# Altium PCB cam_FX3.PcbDoc (part 1 of 2)
Units mm, origin at the board's own origin, x right, y up, seen from the top; angles counter-clockwise.
Board outline 27 x 27 mm, 6 copper layers (Signal_T, GND_T, PWR, Signal_INT, GND_B, Signal_B), stack 0.816 mm thick; 79 components, 95 nets, 507 pads, 300 vias.
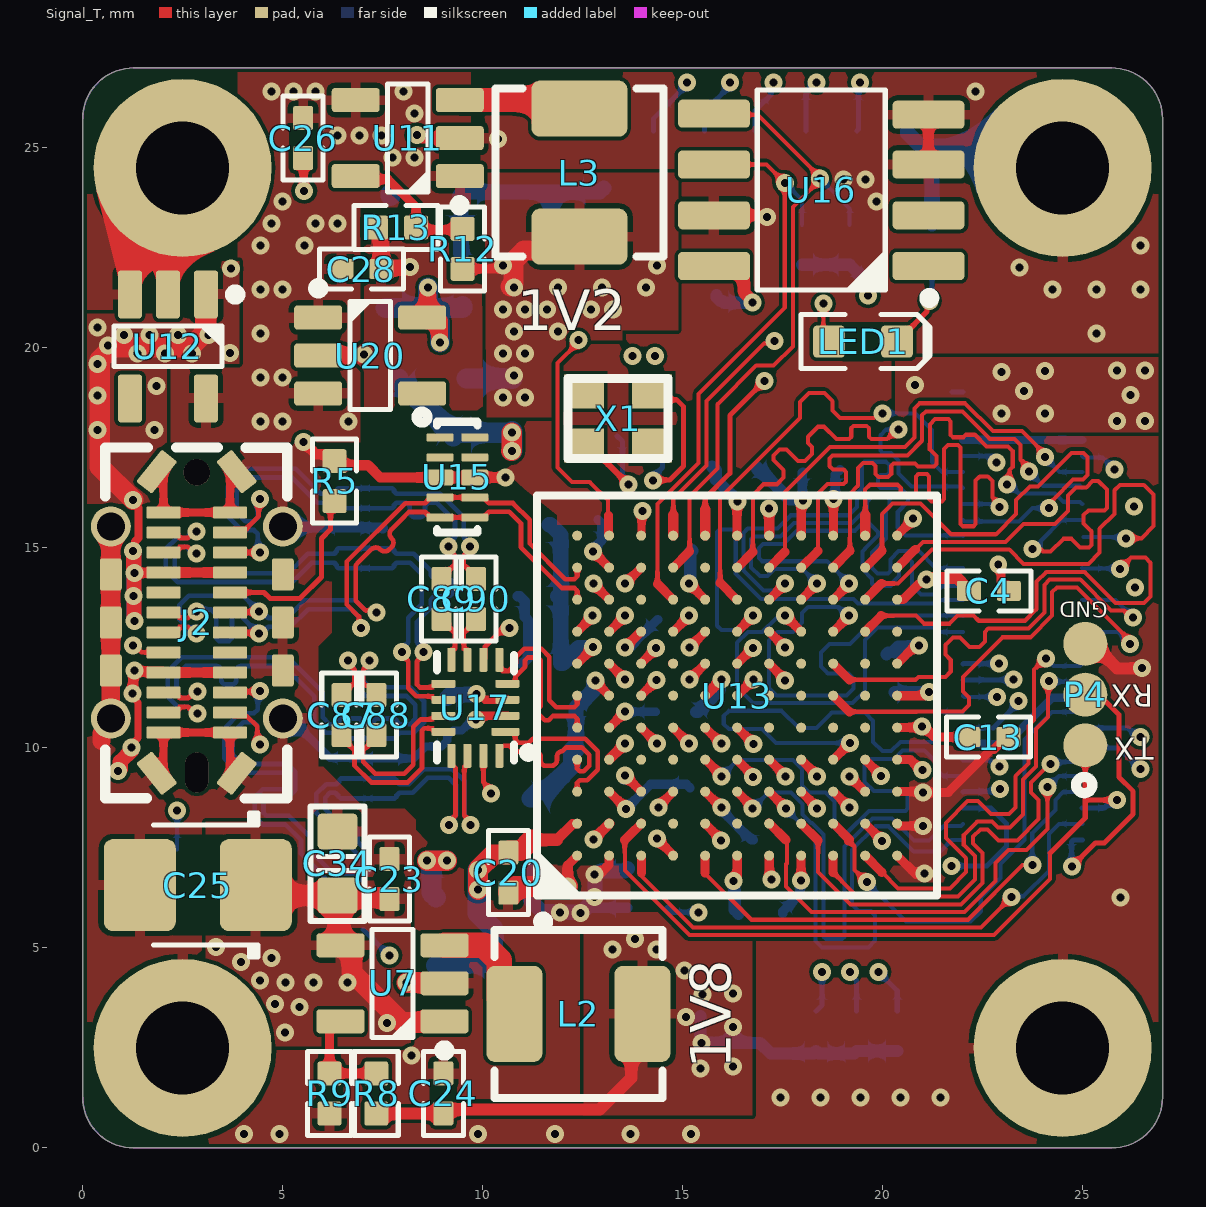
[diagram p0: Signal_T view]
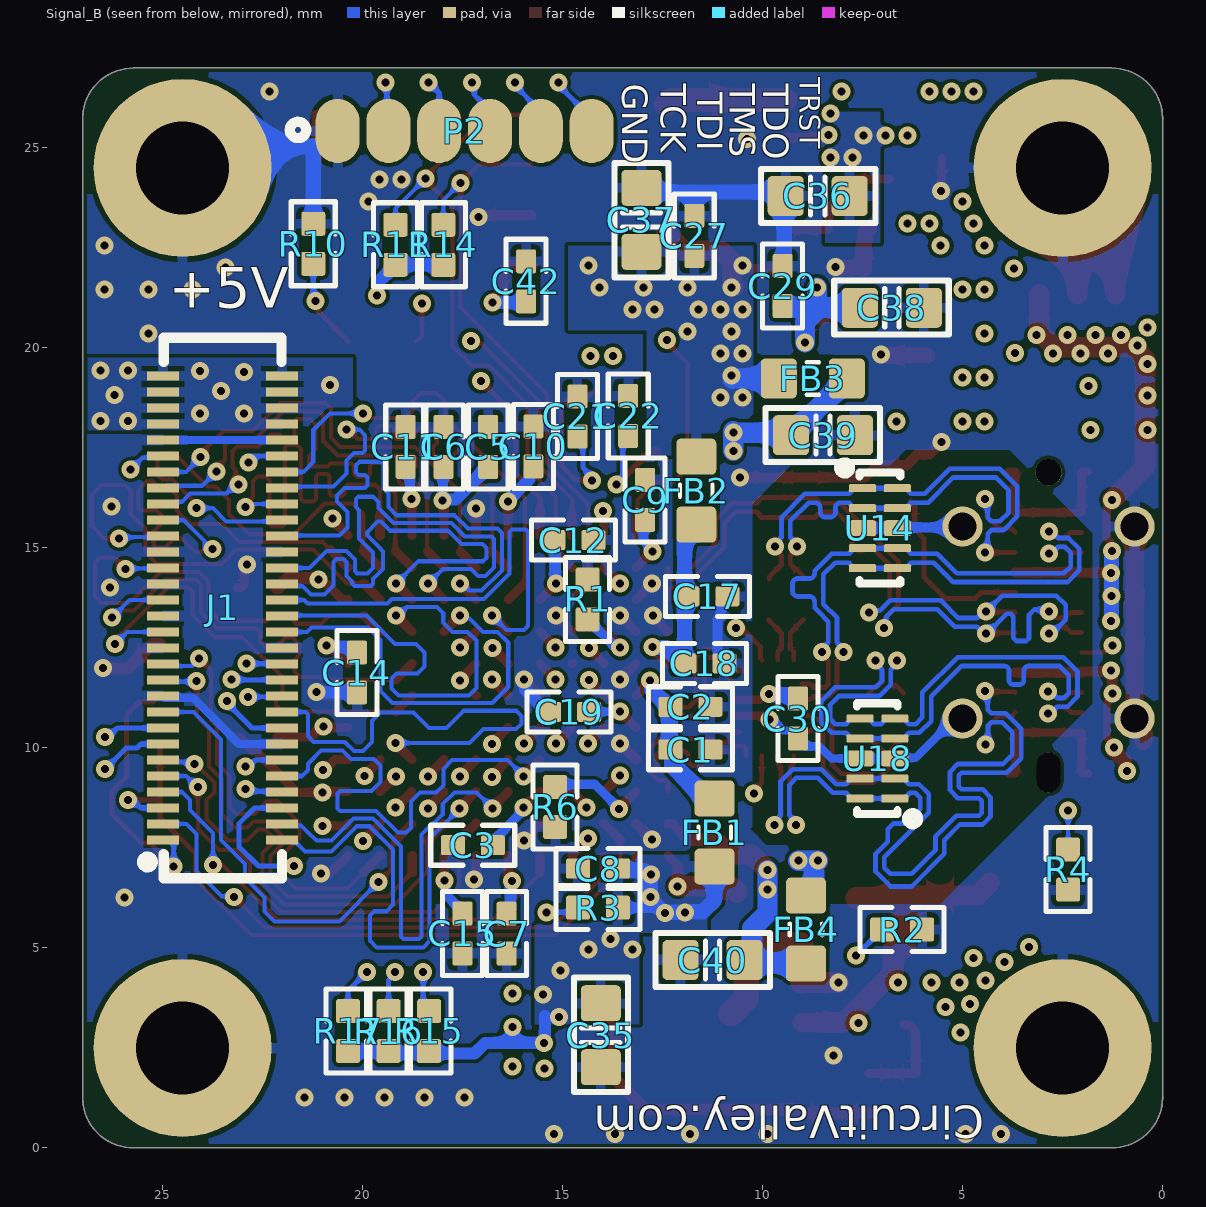
[diagram p1: Signal_B view, seen from below]
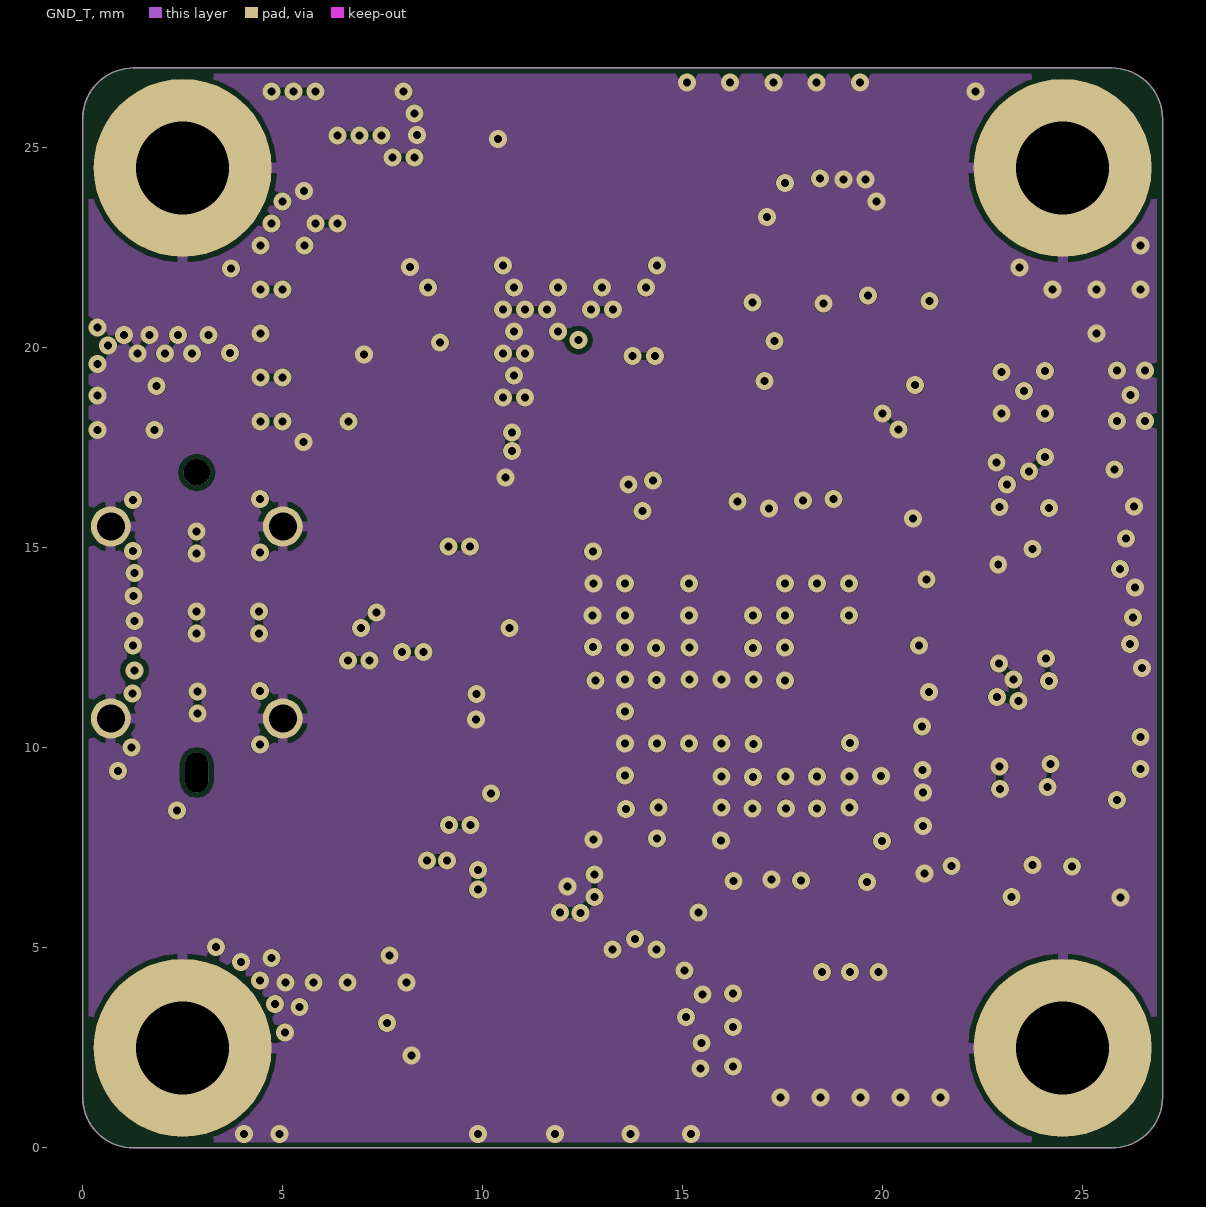
[diagram p2: GND_T]
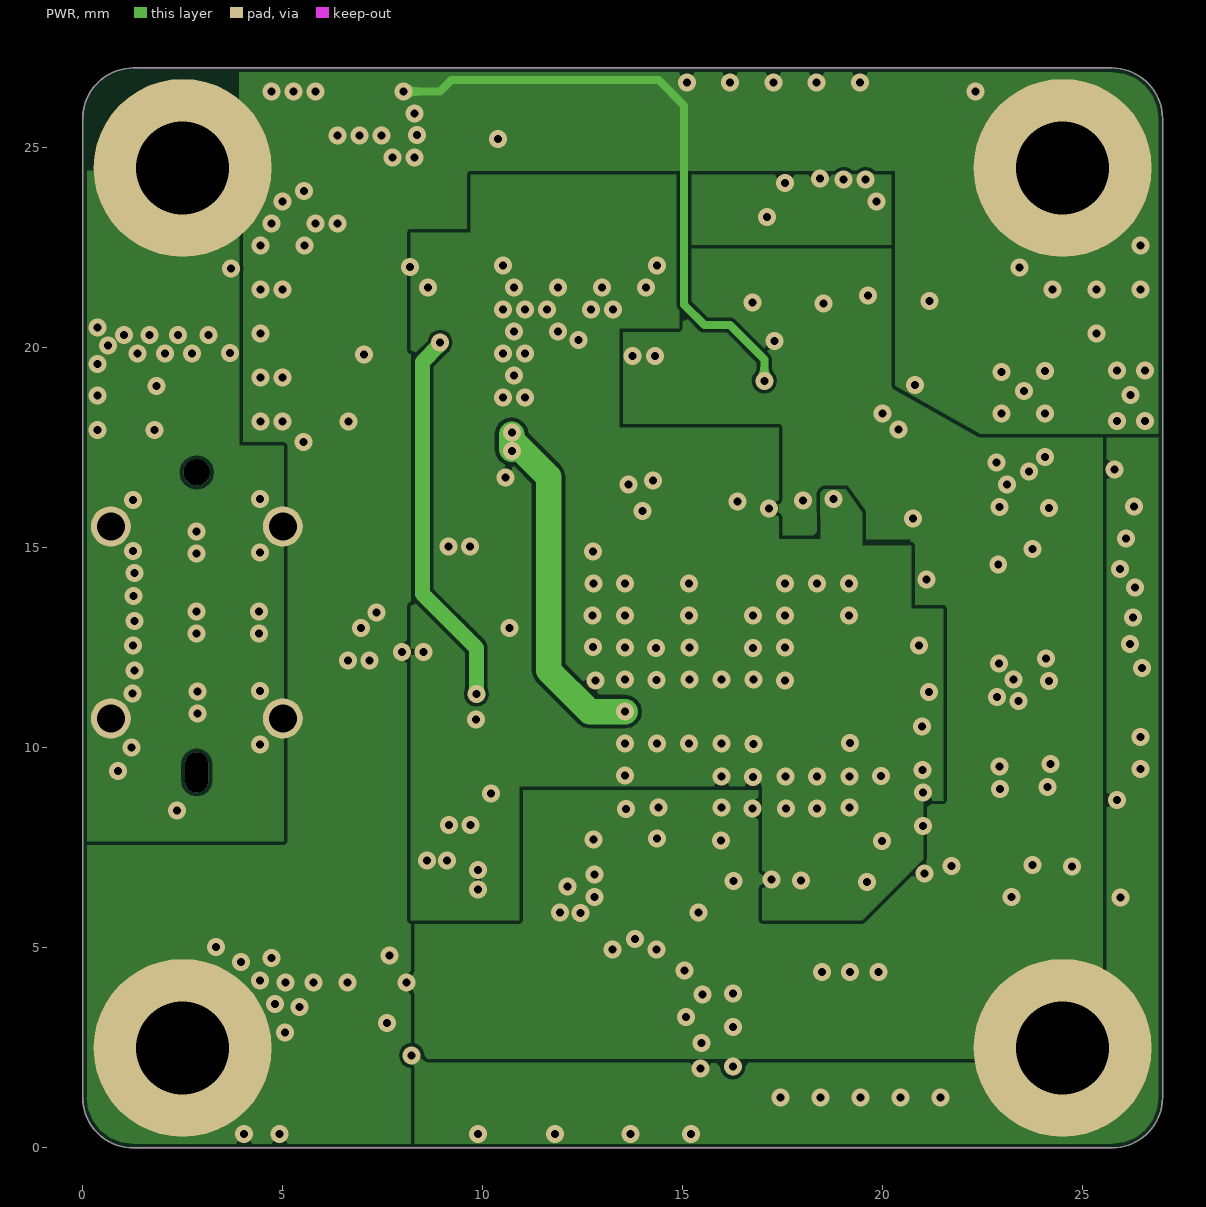
[diagram p3: PWR]
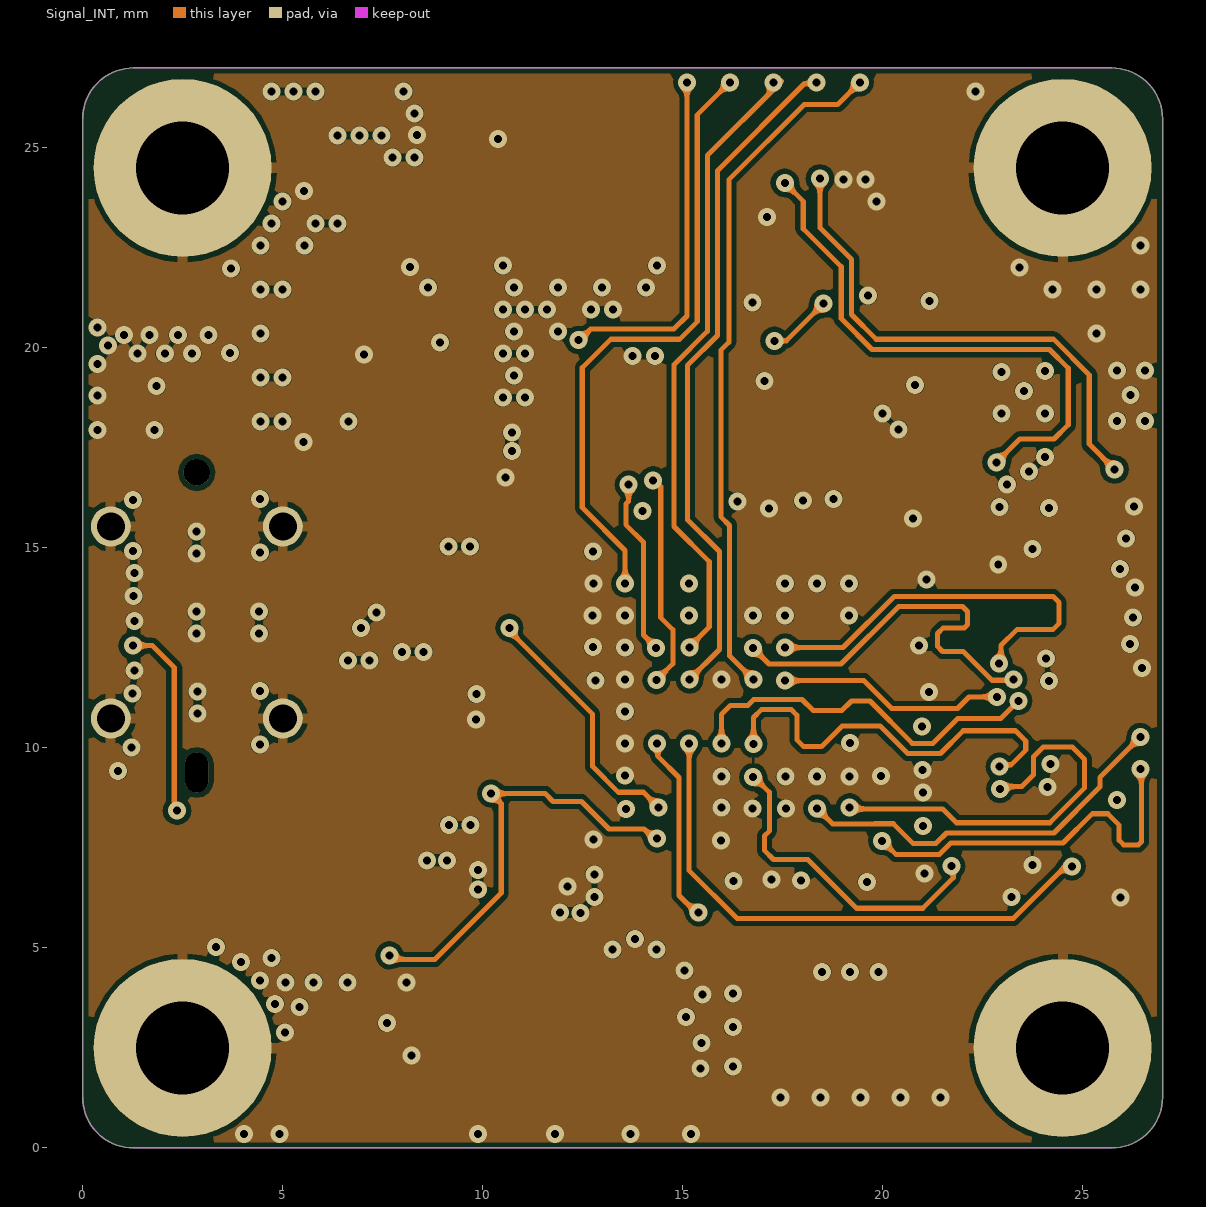
[diagram p4: Signal_INT]
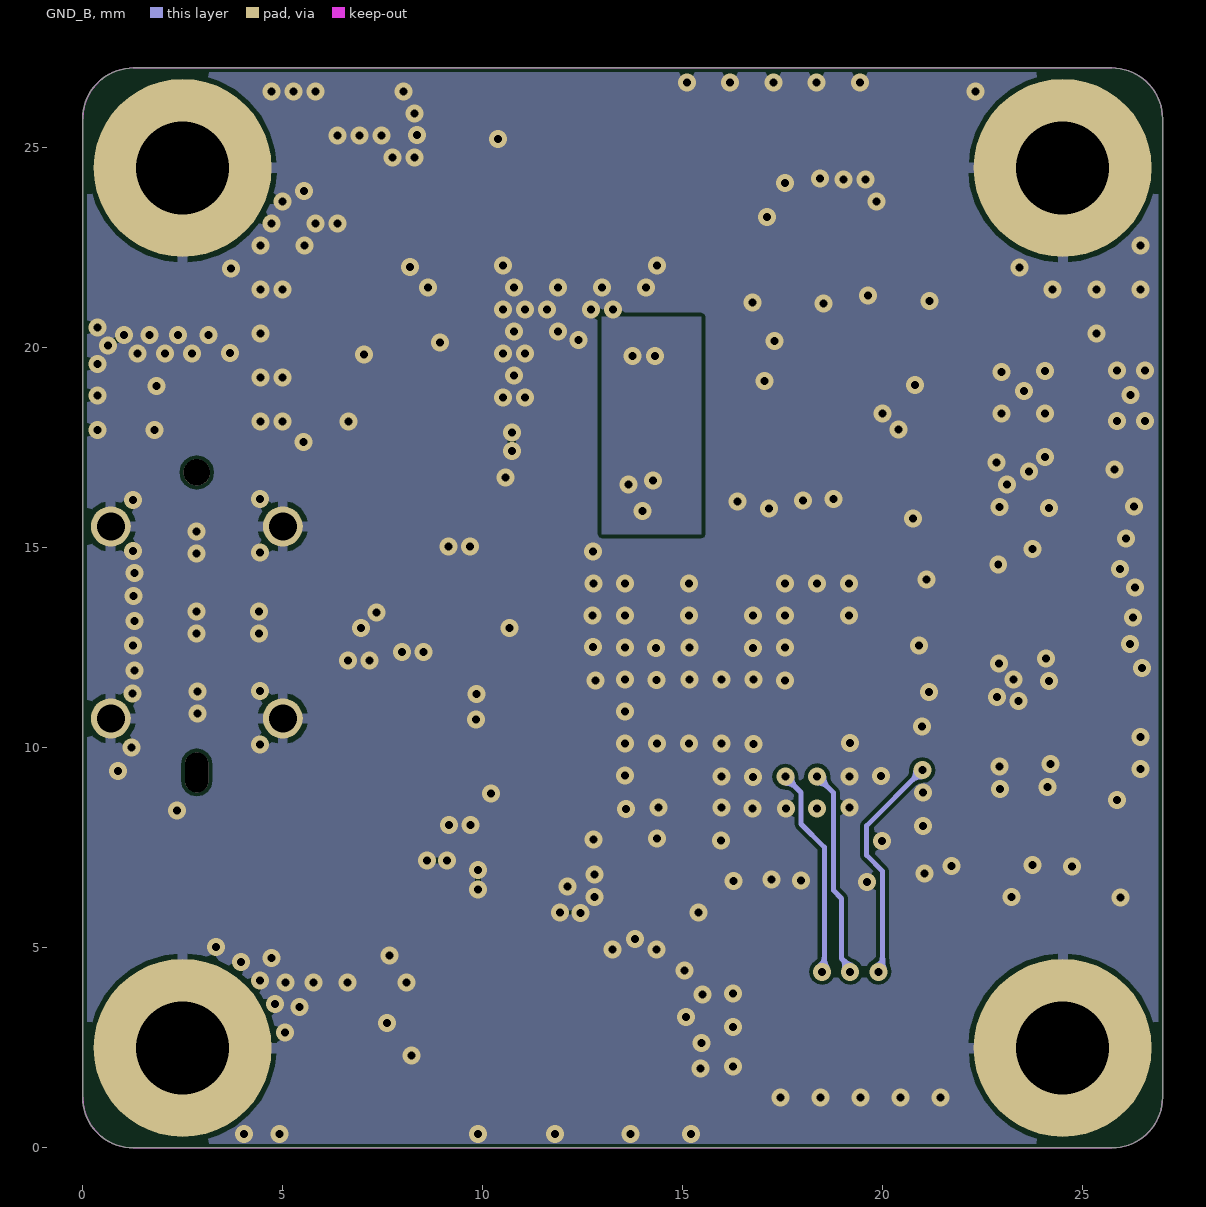
[diagram p5: GND_B]
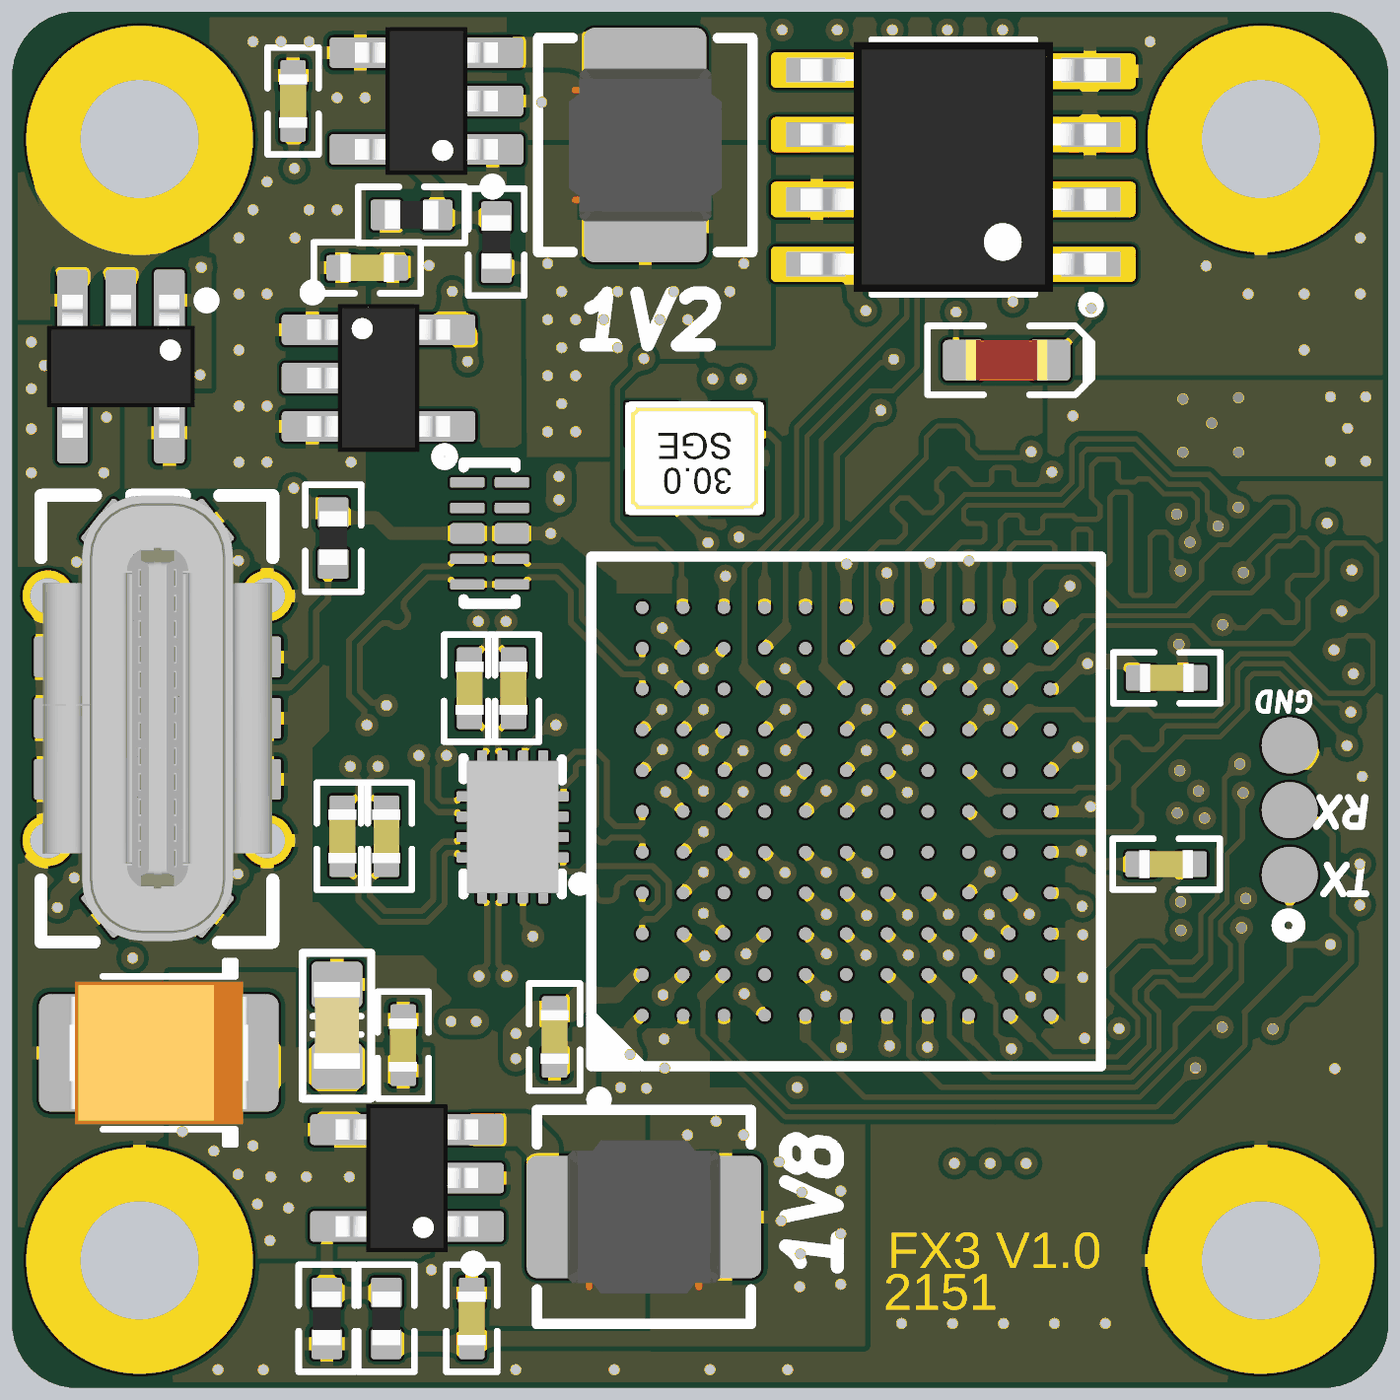
[diagram p7: 3D render of the assembled board from above, using the file's embedded part models]
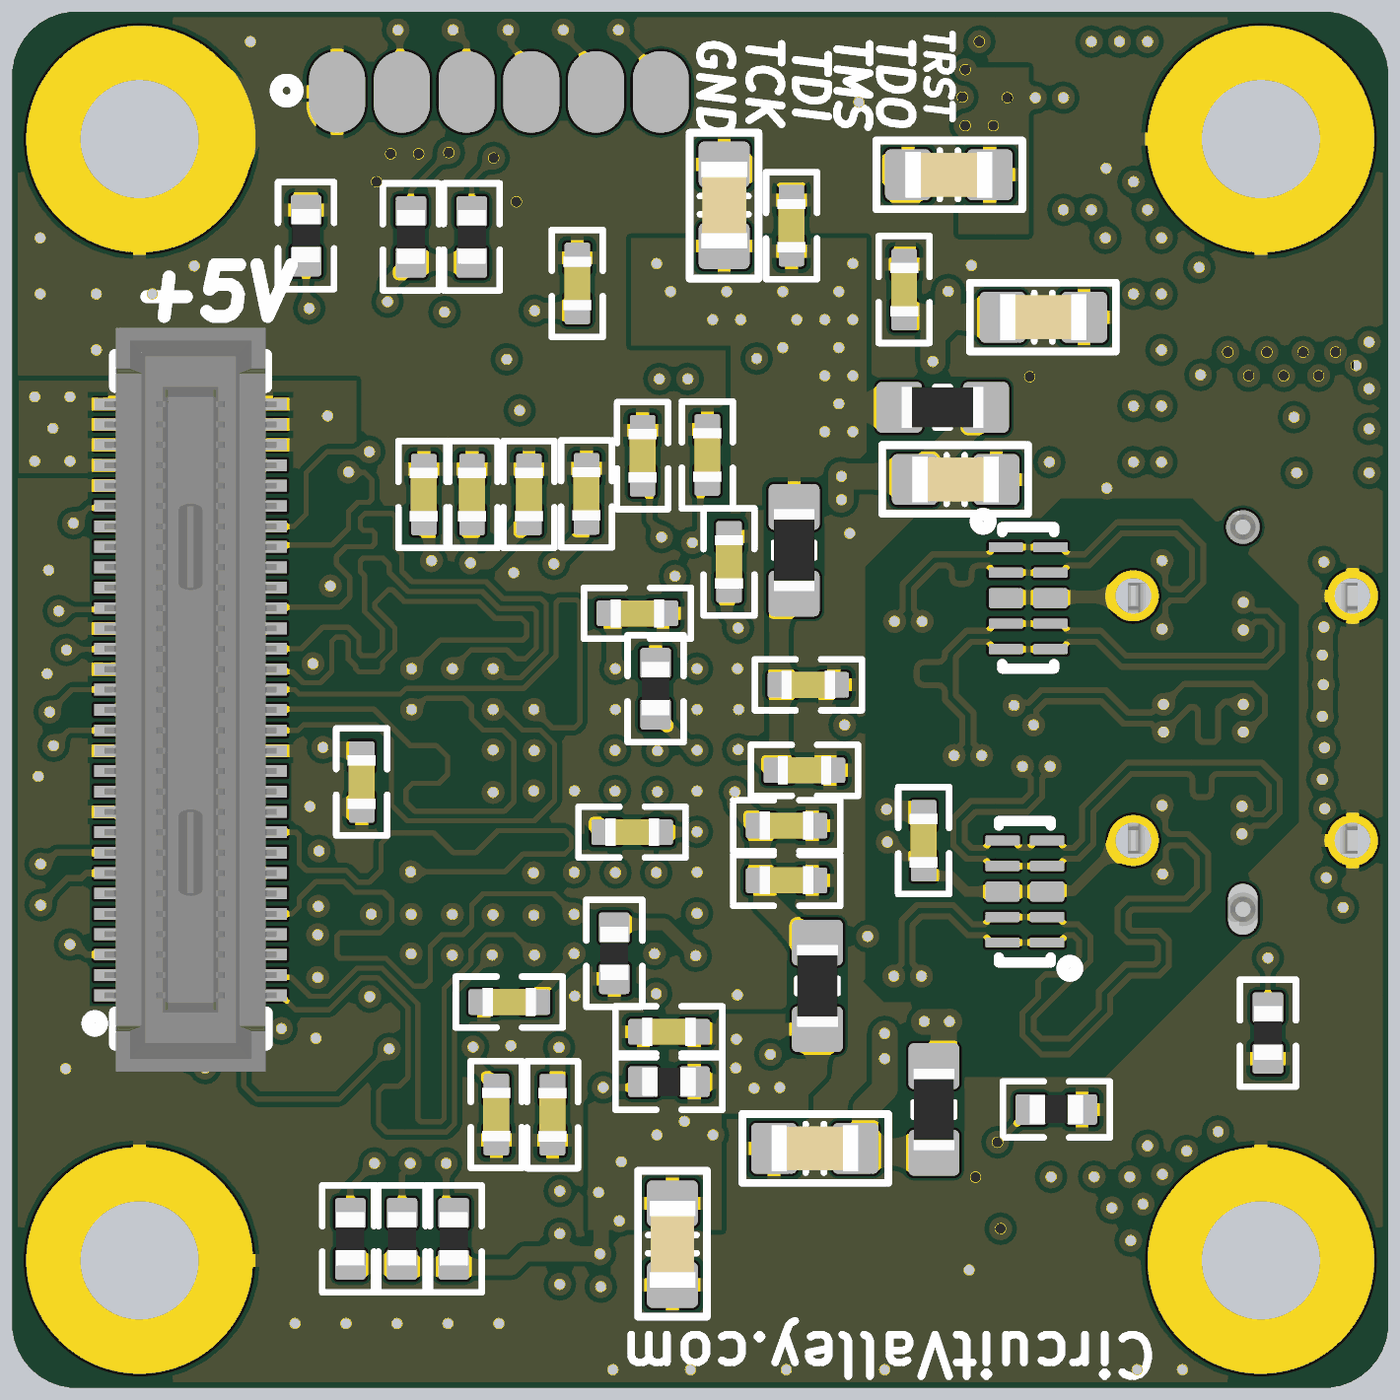
[diagram p8: 3D render of the assembled board from below, using the file's embedded part models]

## Layer stack, top to bottom
Top Solder: solder mask 0.0102, Solder Resist, Dk 3.5
Signal_T: signal copper 0.0356
Dielectric 2: prepreg 0.0711, PP-006, Dk 4.1
GND_T: signal copper 0.035
Dielectric 4: prepreg 0.0711, PP-006, Dk 4.1
PWR: signal copper 0.035
Dielectric 1: dielectric 0.32, FR-4, Dk 4.8
Signal_INT: signal copper 0.035
Dielectric 5: prepreg 0.0711, PP-006, Dk 4.1
GND_B: signal copper 0.035
Dielectric 3: prepreg 0.0711, PP-006, Dk 4.1
Signal_B: signal copper 0.0356
Bottom Solder: solder mask 0.0102, Solder Resist, Dk 3.5

## Board outline
0,1.27 0,25.73 cw(c1.27,25.73) 1.27,27 25.73,27 cw(c25.73,25.73) 27,25.73 27,1.27 cw(c25.73,1.27) 25.73,0 1.27,0 cw(c1.27,1.27)

## Design rules (kind name [scope] priority, off if disabled: settings)
Clearance Clearance_GNDT [OnLayer('GND_T')] p1: gap=0.127 ignorepadtopadclearanceinfootprint=FALSE
Clearance Clearance_INT [OnLayer('Signal_INT')] p2: gap=0.127 ignorepadtopadclearanceinfootprint=FALSE
Clearance [All] p3: gap=0.091 ignorepadtopadclearanceinfootprint=FALSE
Clearance Clearance_PWR [OnLayer('PWR')] p4: gap=0.127 ignorepadtopadclearanceinfootprint=FALSE
Clearance Clearance_GNDB [OnLayer('GND_B')] p5: gap=0.127 ignorepadtopadclearanceinfootprint=FALSE
ComponentClearance [All] p1: gap=0.254 collisioncheckmode=3 verticalgap=0 showdistances=FALSE
DiffPairsRouting [All] p1: maxlimit=0.102 minlimit=0.102 mostfreqgap=0.102 toplayer_minwidth=0.117 toplayer_maxwidth=0.254 toplayer_prefwidth=0.117 midlayer1_minwidth=0.117 midlayer1_maxwidth=0.254 midlayer1_prefwidth=0.117 midlayer2_minwidth=0.117 midlayer2_maxwidth=0.254 midlayer2_prefwidth=0.117 midlayer3_minwidth=0.117 midlayer3_maxwidth=0.254 midlayer3_prefwidth=0.117 midlayer4_minwidth=0.117 midlayer4_maxwidth=0.254 midlayer4_prefwidth=0.117 bottomlayer_minwidth=0.117 bottomlayer_maxwidth=0.254 bottomlayer_prefwidth=0.117 maxuncoupledlength=12.7
HoleSize [All] p1: absolutevalues=TRUE maxlimit=5 minlimit=0.025 maxpercent=80.000 minpercent=20.000
MatchedLengths Matched_MIPI_GRP [InNetClass('MIPI')] p1: tolerance=0.127 checknetsindiffpair=FALSE checkdiffpairvsdiffpair=TRUE checkxsignals=TRUE checkothers=TRUE
MatchedLengths Matched_MIPI [InNetClass('MIPI')] p2: tolerance=0.127 checknetsindiffpair=TRUE checkdiffpairvsdiffpair=FALSE checkxsignals=FALSE checkothers=FALSE
MatchedLengths Matched_GPIF_GRP [InNetClass('GPIF')] p3: tolerance=1.27 checknetsindiffpair=FALSE checkdiffpairvsdiffpair=TRUE checkxsignals=TRUE checkothers=TRUE
MatchedLengths Matched_USB3FX_GRP [InNetClass('USB3FX')] p4: tolerance=0.127 checknetsindiffpair=FALSE checkdiffpairvsdiffpair=TRUE checkxsignals=TRUE checkothers=TRUE
MatchedLengths Match_USB3FX [InNetClass('USB3FX')] p5: tolerance=0.102 checknetsindiffpair=TRUE checkdiffpairvsdiffpair=FALSE checkxsignals=FALSE checkothers=FALSE
MatchedLengths Matched_USB3_2_GRP [InNetClass('USB3_2')] p6: tolerance=0.254 checknetsindiffpair=FALSE checkdiffpairvsdiffpair=TRUE checkxsignals=TRUE checkothers=TRUE
MatchedLengths Matched_USB3_1_GRP [InNetClass('USB3_1')] p7: tolerance=0.254 checknetsindiffpair=FALSE checkdiffpairvsdiffpair=TRUE checkxsignals=TRUE checkothers=TRUE
MatchedLengths Matched_USB2 [InNetClass('USB2')] p8: tolerance=1.016 checknetsindiffpair=TRUE checkdiffpairvsdiffpair=FALSE checkxsignals=FALSE checkothers=FALSE
MatchedLengths Matched_USB3_1 [InNetClass('USB3_1')] p9: tolerance=0.102 checknetsindiffpair=TRUE checkdiffpairvsdiffpair=FALSE checkxsignals=FALSE checkothers=FALSE
MatchedLengths Matched_USB3_2 [InNetClass('USB3_2')] p10: tolerance=0.102 checknetsindiffpair=TRUE checkdiffpairvsdiffpair=FALSE checkxsignals=FALSE checkothers=FALSE
MinimumSolderMaskSliver [All] p1: minsoldermaskwidth=0.001
PlaneClearance [All] p1: clearance=0.152
PlaneConnect PlaneConnect_1 [All] p1: pad.planeconnectstyle=Relief pad.reliefexpansion=0.508 pad.reliefentries=4 pad.reliefconductorwidth=0.254 pad.reliefairgap=0.127 via.planeconnectstyle=Direct via.reliefexpansion=0.508 via.reliefentries=4 via.reliefconductorwidth=0.254 via.reliefairgap=0.254
PolygonConnect [All] p1: thpad.connectstyle=Relief thpad.reliefconductorwidth=0.254 thpad.reliefentries=4 thpad.polygonreliefangle="90 Angle" thpad.airgapwidth=0.127 smdpad.connectstyle=Relief smdpad.reliefconductorwidth=0.254 smdpad.reliefentries=4 smdpad.polygonreliefangle="90 Angle" smdpad.airgapwidth=0.127 via.connectstyle=Direct via.reliefconductorwidth=0.254 via.reliefentries=4 via.polygonreliefangle="90 Angle" via.airgapwidth=0.254
RoutingVias [All] p1: holewidth=0.2 width=0.45 viastyle="Through Hole" minholewidth=0.2 minwidth=0.45 maxholewidth=6.3 maxwidth=7
SilkToSilkClearance [All] p1: silktosilkclearance=0
SilkToSolderMaskClearance [IsPad] p1: minsilkscreentomaskgap=0 clearancetoexposedcopper=TRUE
SolderMaskExpansion [All] p1: expansion=0.05 istentingtop=FALSE
Width [All] p1: maxlimit=1.27 minlimit=0.09 preferedwidth=0.127 midlayer1_minwidth=0.127 midlayer2_minwidth=0.127 midlayer3_minwidth=0.127 midlayer4_minwidth=0.127 minimp=50.000000 maximp=50.000000 favimp=50.000000
22 further rules are at their usual default settings.

## Classes and differential pairs
net class GPIF: FPGA_CLK FPGA_CTL0 FPGA_CTL1 FPGA_D0 FPGA_D1 FPGA_D2 FPGA_D3 FPGA_D4 FPGA_D5 FPGA_D6 FPGA_D7 FPGA_D8 FPGA_D9 FPGA_D10 FPGA_D11 FPGA_D12 FPGA_D13 FPGA_D14 FPGA_D15 FPGA_D16 FPGA_D17 FPGA_D18 FPGA_D19 FPGA_D20 FPGA_D21 FPGA_D22 FPGA_D23 FPGA_D24 FPGA_D25 FPGA_D26 FPGA_D27 FPGA_D28 FPGA_D29 FPGA_D30 FPGA_D31 NetU13_H7 NetU13_K7
net class USB3_2: SS_RX2_N SS_RX2_P SS_TX2_N SS_TX2_P
net class USB3FX: FX3_SSRX_N FX3_SSRX_P FX3_SSTX_N FX3_SSTX_P
net class USB2: SS_D_N SS_D_P
net class USB3_1: SS_RX1_N SS_RX1_P SS_TX1_N SS_TX1_P
component class usb: C1 C2 C3 C4 C5 C6 C7 C8 C9 C10 C11 C12 C13 C14 C15 C17 C18 C19 C20 C21 C22 C30 C39 C40 C42 C87 C88 C89 C90 FB1 FB2 FB3 FB4 J2 LED1 P2 P4 R1 R2 R3 R4 R5 R6 R10 R11 R14 R15 R16 R17 U12 U13 U14 U15 U16 U17 U18 X1
component class power: C23 C24 C25 C26 C27 C28 C29 C34 C35 C36 C37 C38 L2 L3 R8 R9 R12 R13 U7 U11 U20
component class camera: J1
differential pair C1: +C1_P -C1_N
differential pair B1: +B1_P -B1_N
differential pair SS_TX2: +SS_TX2_P -SS_TX2_N
differential pair SS_TX1: +SS_TX1_P -SS_TX1_N
differential pair SS_RX1: +SS_RX1_P -SS_RX1_N
differential pair FX3_SSTX: +FX3_SSTX_P -FX3_SSTX_N
differential pair FX3_SSRX: +FX3_SSRX_P -FX3_SSRX_N
differential pair SS_RX2: +SS_RX2_P -SS_RX2_N
differential pair SS_D: +SS_D_P -SS_D_N

## Components (designator, comment, footprint, x,y, rotation, side; value= is the part's Value field where it differs from the comment)
C1 "100n" CAPC1005N 11.805,9.957 r0 bottom
C2 "100n" CAPC1005N 11.805,11.03 r0 bottom
C3 "100n" CAPC1005N 17.247,7.569 r180 bottom
C4 "100n" CAPC1005N 22.655,13.929 r180 top
C5 "100n" CAPC1005N 16.86,17.527 r270 bottom
C6 "100n" CAPC1005N 17.978,17.526 r270 bottom
C7 "100n" CAPC1005N 16.399,5.358 r90 bottom
C8 "100n" CAPC1005N 14.115,6.985 r180 bottom
C9 "100n" CAPC1005N 12.936,16.205 r270 bottom
C10 "100n" CAPC1005N 15.731,17.54 r270 bottom
C11 "100n" CAPC1005N 18.923,17.526 r270 bottom
C12 "100n" CAPC1005N 14.732,15.196 r0 bottom
C13 "100n" CAPC1005N 22.642,10.274 r180 top
C14 "100n" CAPC1005N 20.142,11.887 r90 bottom
C15 "100n" CAPC1005N 17.502,5.363 r90 bottom
C17 "100n" CAPC1005N 11.379,13.792 r0 bottom
C18 "2u2" CAPC1005N 11.455,12.116 r0 bottom
C19 "100n" CAPC1005N 14.836,10.903 r180 bottom
C20 "100n" CAPC1005N 10.643,6.883 r90 top
C21 "100n" CAPC1005N 14.63,18.288 r90 bottom
C22 "100n" CAPC1005N 13.36,18.302 r90 bottom
C23 "100n" CAPC1005N 7.671,6.723 r270 top
C24 "100n" CAPC1005N 9.017,1.364 r270 top
C25 "10µ" CAPMP3528X210N 2.878,6.573 r180 top
C26 "100n" CAPC1005N 5.512,25.248 r90 top
C27 "100n" CAPC1005N 11.709,22.801 r270 bottom
C28 "100n" CAPC1005N 6.968,21.974 r180 top
C29 "100n" CAPC1005N 9.5,21.548 r270 bottom
C30 "100n" CAPC1005N 9.116,10.736 r90 bottom
C34 "approved sub OK" CAPC1608N 6.372,7.113 r90 top value=10u
C35 "approved sub OK" CAPC1608N 14.046,2.819 r270 bottom value=10u
C36 "approved sub OK" CAPC1608N 8.623,23.8 r0 bottom value=10u
C37 "approved sub OK" CAPC1608N 13.03,23.203 r90 bottom value=10u
C38 "approved sub OK" CAPC1608N 6.769,21.006 r180 bottom value=10u
C39 "approved sub OK" CAPC1608N 8.49,17.821 r180 bottom value=22uf
C40 "approved sub OK" CAPC1608N 11.252,4.699 r0 bottom value=22uf
C42 "100n" CAPC1005N 15.913,21.668 r270 bottom
C87 "100n" CAPC1005N 6.477,10.824 r270 top locked
C88 "100n" CAPC1005N 7.343,10.824 r270 top locked
C89 "100n" CAPC1005N 8.974,13.726 r270 top locked
C90 "100n" CAPC1005N 9.837,13.726 r270 top locked
FB1 "Ferrite" INDC1608N 11.201,7.886 r90 bottom
FB2 "Ferrite" INDC1608N 11.659,16.434 r270 bottom
FB3 "Ferrite" INDC1608N 8.745,19.238 r180 bottom
FB4 "Ferrite" INDC1608N 8.915,5.461 r270 bottom
J1 "DF40HC(4.0)-60DS-0.4V(51)" DF40HC(4.0)-60DS-0.4V(51) 23.5,13.5 r90 bottom locked
J2 "USB C Connector" 10132328-10001LF 2.853,13.139 r270 top locked
L2 "2u2" FDSD0420-H-2R2M 12.395,3.353 r0 top
L3 "2u2" FDSD0420-H-2R2M 12.421,24.384 r270 top
LED1 "Red" LED-0603-RED 19.51,20.16 r0 top
P2 "Header 6" SMD_Solder_points_1.27 17.45,25.451 r180 bottom
P4 "Header 3" SMD_3Solder_points_1.27 25.066,11.309 r90 top
R1 "6.04K" RESC1005N 14.376,13.716 r270 bottom value="6.04K 1%"
R2 "Thick Film" RESC1005N 6.513,5.461 r180 bottom value=5.1K
R3 "Thick Film" RESC1005N 14.115,6.007 r0 bottom value=5.1K
R4 "Thick Film" RESC1005N 2.362,6.96 r270 bottom value=5.1K
R5 "Thick Film" RESC1005N 6.299,16.67 r90 top value=5.1K
R6 "6.04K" RESC1005N 15.186,8.526 r90 bottom value="200R 1%"
R8 "Thick Film" RESC1005N 7.341,1.364 r270 top value=30K
R9 "Thick Film" RESC1005N 6.172,1.364 r270 top value=15K
R10 "Thick Film" RESC1005N 21.234,22.606 r90 bottom value=5.1K
R11 "Thick Film" RESC1005N 19.177,22.581 r90 bottom value=5.1K
R12 "Thick Film" RESC1005N 9.5,22.479 r270 top value=30K
R13 "Thick Film" RESC1005N 7.837,23.014 r0 top value=27K
R14 "Thick Film" RESC1005N 17.983,22.581 r90 bottom value=5.1K
R15 "Thick Film" RESC1005N 18.337,2.923 r270 bottom value=5.1K
R16 "Thick Film" RESC1005N 19.351,2.923 r270 bottom value=5.1K
R17 "Thick Film" RESC1005N 20.365,2.923 r270 bottom value=5.1K
U7 "AP3417C" SOT23-5 7.747,4.116 r180 top
U11 "AP3417C" SOT23-5 8.128,25.248 r180 top
U12 "NCP360SNT1G" SOT23-5 2.134,20.041 r270 top
U13 "CYUSB3014-BZXC" CYP-BZX121 16.364,11.309 r90 top locked
U14 "SP3010-04UTG" uDFN-10 7.066,15.494 r90 bottom locked
U15 "SP3010-04UTG" uDFN-10 9.367,16.764 r90 top
U16 "AT24CM02" SOIC8 18.466,23.952 r180 top
U17 "HD3SS3202" UQFN-16 9.82,11.005 r180 top locked
U18 "SP3010-04UTG" uDFN-10 7.132,9.738 r270 bottom
U20 "MIC550x" SOT23-5 7.188,19.812 r0 top
X1 "ECS-192-7-36B-CKY-TR" "Active Oscillator 2520" 13.388,18.237 r180 top

## Footprints (in the part's own frame and the unit in brackets; to place one, negate y for a bottom-side part, rotate by r counter-clockwise, add the part's x,y. Pads: shape width x height; smd on the part's side, far side on the other; paste and mask are expansions set on the pad)
10132328-10001LF [mm] "USB 3.1 USB C Vertical"
  rrect20% 1.03x0.5 smd rot 141: 0(-3.77,-1) 0(3.77,1)
  rrect20% 1.03x0.5 smd rot 39: 0(-3.77,1) 0(3.77,-1)
  round 1 hole 0.7: 0(-2.4,2.15) 0(-2.4,-2.15) 0(2.4,2.15) 0(2.4,-2.15)
  rrect20% 0.8x0.55 smd: 0(-1.2,2.15) 0(-1.2,-2.15) 0(0,2.15) 0(0,-2.15) 0(1.2,2.15) 0(1.2,-2.15)
  round 0.66 hole 0.66 unplated: 1(-3.75,0)
  oval 1x0.58 hole 0.58 slot 1 at 0 deg unplated: 1(3.75,0)
  rrect20% 0.3x0.85 smd: A1(-2.75,0.83) A2(-2.25,0.83) A3(-1.75,0.83) A4(-1.25,0.83) A5(-0.75,0.83) A6(-0.25,0.83) A7(0.25,0.83) A8(0.75,0.83) A9(1.25,0.83) A10(1.75,0.83) A11(2.25,0.83) A12(2.75,0.83) B1(2.75,-0.83) B2(2.25,-0.83) B3(1.75,-0.83) B4(1.25,-0.83) B5(0.75,-0.83) B6(0.25,-0.83) B7(-0.25,-0.83) B8(-0.75,-0.83) B9(-1.25,-0.83) B10(-1.75,-0.83) B11(-2.25,-0.83) B12(-2.75,-0.83)
  silkscreen extent -4.37,-2.29 4.4,2.26, body extent -4.37,-2.25 4.37,2.25, height 8.8
"Active Oscillator 2520" [mm]
  rect 1x0.85 smd: 1(-0.85,-0.675) 2(0.85,-0.675) 3(0.85,0.675) 4(-0.85,0.675)
  silkscreen extent -1.25,-1 1.25,1, body extent -1.25,-1 1.25,1, height 0.56
CAPC1005N [mm] "Chip Capacitor, Body 1.0x0.5mm, 0402, IPC Medium Density"
  round 0.2 on Mech14: 0(0,0)
  rrect20% 0.6x0.5 smd: 1(-0.5,0) 2(0.5,0)
  Signal_T pour cut-out: -0.2,0.35 0.2,0.35 0.2,-0.35 -0.2,-0.35
  silkscreen extent -1.05,-0.5 1.05,0.5, body extent -0.52,-0.27 0.53,0.28, height 0.55
CAPC1608N [mm] "Chip Capacitor, Body 1.6x0.8mm, 0603, IPC Medium Density"
  round 0.254 on Mech14: 0(0,0)
  rrect25% 0.9x1 smd: 1(-0.8,0) 2(0.8,0)
  silkscreen extent -1.44,-0.67 1.42,0.68, body extent -0.85,-0.45 0.85,0.45, height 0.89
CAPMP3528X210N [mm] "Molded body capacitor, Body 3.5x2.8mm, 1210, IPC Nominal settings"
  round 0.254 on Mech14: 0(0,0)
  rrect25% 1.8x2.3 smd: 1(-1.45,0) 2(1.45,0)
  Signal_T pour cut-out: -0.508,1.27 0.508,1.27 0.508,-1.27 -0.508,-1.27
  silkscreen extent -1.5,-1.8 1.1,1.8, body extent -1.75,-1.4 1.75,1.4, height 2.1
CYP-BZX121 [mm] "BGA, 121-Balls, Body 10x10mm, Pitch 0.8mm"
  round 0.25 smd: A1(-4,4) A2(-3.2,4) A3(-2.4,4) A4(-1.6,4) A5(-0.8,4) A6(0,4) A7(0.8,4) A8(1.6,4) A9(2.4,4) A10(3.2,4) A11(4,4) B1(-4,3.2) B2(-3.2,3.2) B3(-2.4,3.2) B4(-1.6,3.2) B5(-0.8,3.2) B6(0,3.2) B7(0.8,3.2) B8(1.6,3.2) B9(2.4,3.2) B10(3.2,3.2) B11(4,3.2) C1(-4,2.4) C2(-3.2,2.4) C3(-2.4,2.4) C4(-1.6,2.4) C5(-0.8,2.4) C6(0,2.4) C7(0.8,2.4) C8(1.6,2.4) C9(2.4,2.4) C10(3.2,2.4) C11(4,2.4) D1(-4,1.6) D2(-3.2,1.6) D3(-2.4,1.6) D4(-1.6,1.6) D5(-0.8,1.6) D6(0,1.6) D7(0.8,1.6) D8(1.6,1.6) D9(2.4,1.6) D10(3.2,1.6) D11(4,1.6) E1(-4,0.8) E2(-3.2,0.8) E3(-2.4,0.8) E4(-1.6,0.8) E5(-0.8,0.8) E6(0,0.8) E7(0.8,0.8) E8(1.6,0.8) E9(2.4,0.8) E10(3.2,0.8) E11(4,0.8) F1(-4,0) F2(-3.2,0) F3(-2.4,0) F4(-1.6,0) F5(-0.8,0) F6(0,0) F7(0.8,0) F8(1.6,0) F9(2.4,0) F10(3.2,0) F11(4,0) G1(-4,-0.8) G2(-3.2,-0.8) G3(-2.4,-0.8) G4(-1.6,-0.8) G5(-0.8,-0.8) G6(0,-0.8) G7(0.8,-0.8) G8(1.6,-0.8) G9(2.4,-0.8) G10(3.2,-0.8) G11(4,-0.8) H1(-4,-1.6) H2(-3.2,-1.6) H3(-2.4,-1.6) H4(-1.6,-1.6) H5(-0.8,-1.6) H6(0,-1.6) H7(0.8,-1.6) H8(1.6,-1.6) H9(2.4,-1.6) H10(3.2,-1.6) H11(4,-1.6) J1(-4,-2.4) J2(-3.2,-2.4) J3(-2.4,-2.4) J4(-1.6,-2.4) J5(-0.8,-2.4) J6(0,-2.4) J7(0.8,-2.4) J8(1.6,-2.4) J9(2.4,-2.4) J10(3.2,-2.4) J11(4,-2.4) K1(-4,-3.2) K2(-3.2,-3.2) K3(-2.4,-3.2) K4(-1.6,-3.2) K5(-0.8,-3.2) K6(0,-3.2) K7(0.8,-3.2) K8(1.6,-3.2) K9(2.4,-3.2) K10(3.2,-3.2) K11(4,-3.2) L1(-4,-4) L2(-3.2,-4) L3(-2.4,-4) L4(-1.6,-4) L5(-0.8,-4) L6(0,-4) L7(0.8,-4) L8(1.6,-4) L9(2.4,-4) L10(3.2,-4) L11(4,-4)
  silkscreen extent -5.77,-5 5,5, body extent -5,-5 5,5, height 1.2
DF40HC(4.0)-60DS-0.4V(51) [mm] "Hiros 60Pin 0.4mm Connector Used with Camera Sensors"
  rect 0.23x0.8 smd: 1(-5.8,1.49) 2(-5.8,-1.49) 3(-5.4,1.49) 4(-5.4,-1.49) 5(-5,1.49) 6(-5,-1.49) 7(-4.6,1.49) 8(-4.6,-1.49) 9(-4.2,1.49) 10(-4.2,-1.49) 11(-3.8,1.49) 12(-3.8,-1.49) 13(-3.4,1.49) 14(-3.4,-1.49) 15(-3,1.49) 16(-3,-1.49) 17(-2.6,1.49) 18(-2.6,-1.49) 19(-2.2,1.49) 20(-2.2,-1.49) 21(-1.8,1.49) 22(-1.8,-1.49) 23(-1.4,1.49) 24(-1.4,-1.49) 25(-1,1.49) 26(-1,-1.49) 27(-0.6,1.49) 28(-0.6,-1.49) 29(-0.2,1.49) 30(-0.2,-1.49) 31(0.2,1.49) 32(0.2,-1.49) 33(0.6,1.49) 34(0.6,-1.49) 35(1,1.49) 36(1,-1.49) 37(1.4,1.49) 38(1.4,-1.49) 39(1.8,1.49) 40(1.8,-1.49) 41(2.2,1.49) 42(2.2,-1.49) 43(2.6,1.49) 44(2.6,-1.49) 45(3,1.49) 46(3,-1.49) 47(3.4,1.49) 48(3.4,-1.49) 49(3.8,1.49) 50(3.8,-1.49) 51(4.2,1.49) 52(4.2,-1.49) 53(4.6,1.49) 54(4.6,-1.49) 55(5,1.49) 56(5,-1.49) 57(5.4,1.49) 58(5.4,-1.49) 59(5.8,1.49) 60(5.8,-1.49)
  silkscreen extent -6.76,-1.48 6.76,2.01, body extent -7.3,-1.69 7.3,1.69, height 3.91
FDSD0420-H-2R2M [mm] "Murata"
  rrect30% 1.4x2.4 smd: 1(-1.6,0) 2(1.6,0)
  silkscreen extent -2.1,-2.1 2.1,2.1, body extent -1.5,-1.5 1.5,1.5, height 1.35
INDC1608N [mm] "Chip bead, Body 1.6x0.8mm, 0603, IPC Medium Density"
  round 0.254 on Mech14: 0(0,0)
  rrect25% 0.9x1 smd: 1(-0.85,0) 2(0.85,0)
  Signal_T pour cut-out: -0.4,0.6 0.4,0.6 0.4,-0.6 -0.4,-0.6
  silkscreen extent -0.15,-0.41 0.15,0.41, body extent -0.8,-0.4 0.8,0.4, height 0.79
LED-0603-RED [mm]
  round 0.254 on Mech14: 0(0,0)
  rrect25% 0.8x0.8 smd: A(-0.85,0) K(0.85,0)
  Signal_T pour cut-out: -0.5,0.5 0.5,0.5 0.5,-0.5 -0.5,-0.5
  silkscreen extent -1.55,-0.67 1.68,0.67, body extent -0.8,-0.4 0.8,0.4, height 0.75
RESC1005N [mm] "Chip Resistor, Body 1.0x0.5mm, EIA 0402, IPC Medium Density"
  round 0.2 on Mech14: 0(0,0)
  rrect20% 0.6x0.6 smd: 1(-0.5,0) 2(0.5,0)
  Signal_T pour cut-out: -0.2,0.35 0.2,0.35 0.2,-0.35 -0.2,-0.35
  silkscreen extent -1.05,-0.55 1.05,0.55, body extent -0.52,-0.27 0.53,0.28, height 0.4
SMD_3Solder_points_1.27 [mm]
  round 1.1 smd: 1(-1.245,0) 2(0.025,0) 3(1.295,0)
  silkscreen extent -2.44,-0.18 -2.03,0.23
SMD_Solder_points_1.27 [mm]
  oval 1.1x1.6 smd: 1(-3.175,-0.025) 2(-1.905,-0.025) 3(-0.635,-0.025) 4(0.635,-0.025) 5(1.905,-0.025) 6(3.175,-0.025)
  silkscreen extent -4.37,-0.2 -3.96,0.2
SOIC8 [mm]
  rrect30% 1x1 on Mech14: 0(0,0)
  rrect30% 1.8x0.7 smd paste-2: 1(-2.68,1.905) 2(-2.68,0.635) 3(-2.68,-0.635) 4(-2.68,-1.88) 5(2.68,-1.905) 6(2.68,-0.635) 7(2.68,0.635) 8(2.68,1.905)
  silkscreen extent -2.83,-2.5 1.6,2.82, body extent -3,-2.45 3,2.45, height 1.75
SOT23-5 [mm]
  round 0.5 on Mech14: 0(0,0)
  rrect25% 1.2x0.6 smd: 1(-1.3,0.95) 2(-1.3,0) 3(-1.3,-0.95) 4(1.3,-0.95) 5(1.3,0.95)
  silkscreen extent -1.42,-1.35 0.51,1.81, body extent -1.4,-1.45 1.4,1.45, height 1.44
uDFN-10 [mm] "SP3010-04UTG"
  rrect30% 0.2x0.675 smd: 1(1,0.437) 2(0.5,0.437) 4(-0.5,0.437) 5(-1,0.437) 6(-1,-0.437) 7(-0.5,-0.437) 9(0.5,-0.437) 10(1,-0.437)
  rrect30% 0.4x0.675 smd: 3(0,0.437) 8(0,-0.437)
  silkscreen extent -1.38,-0.51 1.64,1.02, body extent -1.24,-0.51 1.27,0.51, height 0.5
UQFN-16 [mm] "HD3SS3202"
  rrect30% 0.7x0.2 smd: 1(-0.75,0.6)
  rrect30% 0.6x0.2 smd: 2(-0.8,0.2) 3(-0.8,-0.2) 4(-0.8,-0.6) 9(0.8,-0.6) 10(0.8,-0.2) 11(0.8,0.2) 12(0.8,0.6)
  rrect30% 0.2x0.6 smd: 5(-0.6,-1.2) 6(-0.2,-1.2) 7(0.2,-1.2) 8(0.6,-1.2) 13(0.6,1.2) 14(0.2,1.2) 15(-0.2,1.2) 16(-0.6,1.2)
  silkscreen extent -1.43,-1.35 0.97,1.32, body extent -0.91,-1.31 0.91,1.31, height 0.57

## Part data
C1 C2 C3 C4 C5 C6 C7 C8 C9 C10 C11 C12 C13 C14 C15 C17 C18 C19 C20 C21 C22 C23 C24 C26 C27 C28 C29 C30 C42 C87 C88 C89 C90: library part CAPC_10n_0402_16V_10%, "Capacitor SMD Cer 10nF 10% 16V X7R 0402", Manufacturer 1="AVX Corporation", Manufacturer 2=Yageo, Manufacturer Part Number 1=0402YC103KAT2A, Manufacturer Part Number 2=CC0402KRX7R7BB103, Operating Temperature="-55°C ~ 125°C", Package / Case="0402 (1005 Metric)", Ratings="16V; X7R", Supplier Part Number 1=478-1114-1-ND, Tolerance=±10%, ComponentLink1Description=http://www.avx.com/docs/Catalogs/cx7r.pdf, ComponentLink1URL=http://www.avx.com/docs/Catalogs/cx7r.pdf, ComponentLink2Description=http://www.yageo.com/documents/recent/UPY-GPHC_X7R_6.3V-to-50V_8.pdf, ComponentLink2URL=http://www.yageo.com/documents/recent/UPY-GPHC_X7R_6.3V-to-50V_8.pdf, Size / Dimension="0.039\" L x 0.020\" W (1.00mm x 0.50mm)", Supplier 1=Digi-Key, Supplier 2=Digi-Key, Supplier Part Number 2=311-1042-1-ND
C25: library part CAPT_47u_1210_6V3, "Capacitor SMD Tantalum 47uF 20% 6.3V 1210", ESR (Equivalent Series Resistance)="70.0 mOhm", Manufacturer 1="AVX Corporation", Manufacturer Part Number 1=TCJB476M006R0070, Manufacturer Size Code=B, Operating Temperature="-55°C ~ 125°C", Package / Case="1210 (3528 Metric)", Ratings=10V, Supplier Part Number 1=478-3139-1-ND, Tolerance=±20%, Voltage - Rated=6V3, ComponentLink1Description=http://www.avx.com/docs/Catalogs/tcj.pdf, ComponentLink1URL=http://www.avx.com/docs/Catalogs/tcj.pdf, Height - Seated (Max)="0.083\" (2.10mm)", Material=Tantalum, Size / Dimension="0.138\" L x 0.110\" W (3.50mm x 2.80mm)", Supplier 1=Digi-Key, Type=Molded
C34 C35 C36 C37 C38 C39 C40: library part CAPC_560p_0603_5%, "Capacitor SMD Cer 560pF 5% 50V NP0 0603", Capacitance=470pF, Manufacturer 1="AVX Corporation", Manufacturer Part Number 1=06035A561JAT2A, Operating Temperature="-55°C ~ 125°C", Package / Case="0603 (1608 metric)", Ratings="50V; NP0", Supplier Part Number 1=478-1184-1-ND, Voltage - Rated=50V, Applications="General Purpose", ComponentLink1Description=http://www.avx.com/docs/Catalogs/ccog.pdf, ComponentLink1URL=http://www.avx.com/docs/Catalogs/ccog.pdf, Height - Seated (Max)=-, Lead Spacing=-, Lead Style=-, Material=ceramic, Mounting Type="Surface Mount, MLCC", Size / Dimension="0.063\" L x 0.032\" W (1.60mm x 0.81mm)", Supplier 1=Digi-Key, Thickness (Max)="0.035\" (0.90mm)"
J1: "Hiros 60 pin Connector"
J2: library part USB_C, "USB C connector"
L2 L3: library part inductor_smd
LED1: library part LED_SMD_Red_0603_220mcd, "LED 0603 SMD Hyper Red 630nm 220mcd 20mA", Manufacturer 1="Kingbright Corp", Manufacturer Part Number 1=APT1608SURCK, Package / Case="0603 (1608 metric)", Ratings="220 mcd; 630 nm", Supplier Part Number 1=754-1123-1-ND, Voltage - Forward (Vf) @ 10mA=1.9V, Voltage - Forward (Vf) Typ=1.95V, Material="AlGaInP on GaAs", Supplier 1=Digi-Key
P2: "Header, 6-Pin", LatestRevisionDate=17-Jul-2002, LatestRevisionNote="Re-released for DXP Platform.", Publisher="Altium Limited"
P4: "Header, 3-Pin", LatestRevisionDate=17-Jul-2002, LatestRevisionNote="Re-released for DXP Platform.", Publisher="Altium Limited"
R1 R2 R3 R4 R5 R6 R8 R9 R10 R11 R12 R13 R14 R15 R16 R17: library part RES_3K3_0402_5%, "Resistor SMD chip 3.3k Ohm 0.063W 5% 0402", Manufacturer 1=Yageo, Manufacturer Part Number 1=RC0402JR-073K3L, Package / Case="0402 (1005 metric)", Ratings="1/16 W", Supplier Part Number 1=311-3.3KJRCT-ND, Tolerance=±5%, ComponentLink1Description=http://www.yageo.com/documents/recent/PYu-RC0402_51_RoHS_L_6.pdf, ComponentLink1URL=http://www.yageo.com/documents/recent/PYu-RC0402_51_RoHS_L_6.pdf, Material="Thick Film", Supplier 1=Digi-Key
U12: "USB Overvoltage Protection"
U13: "EZ-USB(R) FX3: SuperSpeed USB Controller, 512 KB, 60 I/Os, 0 to 70 degC, 121-Pin FBGA (BZX121)", Manufacturer=Cypress, Max. Operating Temp. (degreesC)=70, Max. Operating Voltage (V)=1.25, Min. Operating Temp. (degreesC)=0, Min. Operating Voltage (V)=1.15, Supplier Part Number 1=428-3182-ND, Code_JEDEC="PUB 95", ComponentLink1Description="Manufacturer URL", ComponentLink1URL=http://www.cypress.com/, ComponentLink2Description=Datasheet, ComponentLink2URL=http://www.cypress.com/?docID=49087, ComponentLink3Description="Package Specification", ComponentLink3URL=http://www.cypress.com/?docID=45795, CPU Core="ARM926 EJ-S", DatasheetVersion="Rev. *O", Memory Architecture=SRAM, Memory Size (KB)=512, Mounting Technology="Surface Mount", No. of I/Os=60, PackageDescription="121-Ball FBGA, Body 10 x 10 mm, Pitch 0.8 mm", PackageReference=BZX121, PackageVersion="Rev. *D", PartNumber=CYUSB3014-BZXC, RoHS=Pb-Free, Supplier 1=Digi-Key, Supplier 2=Farnell, Supplier 3=Newark, Supplier 4=Mouser, Supplier Part Number 2=2355789, Supplier Part Number 3=54W7901, Supplier Part Number 4=727-CYUSB3014-BZXC
U14 U15 U18: "ESD Protection"
U16: "2Mbit I2C EEPROM"
U17: "USB 3.0 Mux"
X1: library part Crystal, "Crystal Oscillator"

## Free pads (board coordinates)
  round 4.45 hole 2.32: Q5(2.5,24.5) Q6(24.5,24.5) Q7(24.5,2.5) Q8(2.5,2.5)

## Via types
v1: diameter 0.45, hole 0.2, Signal_T to Signal_B, tented both sides, 300 vias

## Nets (pads, with @x,y where several pads share a name; then routed paths per layer and width w, separated by ;. In a path a pad name is that pad's centre, name@x,y a point inside that pad or via, vN(x,y) a via of type N, cw(c..) or ccw(c..) an arc to the next point about the centre after c; other vN are vias at no path point)
1V2: C9.2 C10.2 C11.2 C12.2 C13.2 C14.2 C15.2 C27.2 C37.1 FB2.1 FB3.1 FB4.1 L3.2 R12.2 U13.B10 U13.C3 U13.E9 U13.F11 U13.H1 U13.J11 U13.L5 U13.L7 | length 19.4
  Signal_T w0.229: R12.2@9.5,21.979 10.712,21.979 10.77,22.037 ; v1@12.756,14.895 12.779,14.895 U13.B10@13.164,14.509 ; v1@13.571,9.303 U13.C3@13.964,8.909 ; v1@15.158,14.104 15.17,14.104 U13.E9@15.564,13.709 ; U13.F11@16.361,15.312 v1@16.361,15.965 ; v1(17.956,6.687) 17.956,6.691 17.962,6.696 17.962,7.307 U13.H1@17.964,7.309 ; U13.J11@18.764,15.309 18.768,15.313 18.768,16.222 18.772,16.226 v1(18.772,16.228) ; U13.L5@20.364,10.509 20.368,10.513 20.961,10.513 v1(20.98,10.533) ; U13.L7@20.364,12.109 20.819,12.564 v1(20.904,12.564) ; v1@21.026,10.513 21.056,10.513 21.295,10.274 C13.2@22.142,10.274
  Signal_T w0.254: U13.F11@16.361,15.312 U13.F11@16.364,15.309 ; v1@16.361,15.965 16.361,16.156 v1(16.371,16.166)
  Signal_T w0.5: v1@10.701,21.539 10.751,21.539 10.751,21.589 10.77,21.607 10.77,22.166 11.039,22.436 11.971,22.436 L3.2@12.421,22.886
  Signal_T w0.508: v1@8.613,7.183 v1@9.106,7.183
  Signal_B w0.229: v1(12.756,14.909) 12.756,14.969 12.978,15.191 12.978,15.612 C9.2@12.885,15.705 ; v1@13.522,9.207 v1@13.522,9.291 ; v1@16.326,16.211 v1(16.371,16.166) ; C15.2@17.502,5.863 17.502,5.913 17.929,6.34 17.929,6.644 17.956,6.672 v1(17.956,6.687) ; v1(18.772,16.228) 18.816,16.272 18.816,16.84 C11.2@18.935,16.959
  Signal_B w0.305: v1(15.164,14.109) 15.192,14.137 15.192,14.901 15.232,14.942 15.245,14.929 ; C10.2@15.731,17.04 15.829,16.942 15.829,16.716 16.328,16.217 16.328,16.213 v1@16.326,16.211 ; C14.2@20.097,12.342 C14.2@20.142,12.387 ; C14.2@20.295,12.387 20.295,12.437 20.392,12.535 20.836,12.535 20.865,12.564 v1(20.904,12.564)
  Signal_B w0.5: v1(8.611,7.188) 8.717,7.082 8.717,6.383 FB4.1@8.839,6.26
  Signal_B w0.508: v1@8.617,7.181 v1@9.11,7.181 ; FB3.1@9.595,19.238 10.734,19.238 v1@10.744,19.228
  other v1: 9.105,7.187 13.564,9.309 10.506,18.758 11.056,18.758 10.781,19.308 10.506,19.858 11.056,19.858 10.781,20.408 11.881,20.408 10.506,20.958 11.056,20.958 11.606,20.958 12.706,20.958 13.256,20.958 10.781,21.508 11.881,21.508 12.981,21.508 14.081,21.508 10.506,22.058 14.356,22.058
1V8: C3.2 C4.2 C5.2 C6.2 C7.2 C8.2 C24.2 C35.1 C42.2 FB1.1 L2.2 R3.1 R8.2 R11.1 R14.1 R15.2 R16.2 R17.2 U13.B1 U13.C11 U13.E3 U13.F1 U13.H11 U13.L9 U16.8 | length 34.1
  Signal_T w0.203: U13.C11@13.964,15.309 13.973,15.318 13.973,15.904 v1(13.995,15.926)
  Signal_T w0.229: v1(12.791,6.841) 12.833,6.883 12.959,6.883 13.16,7.085 13.16,7.305 U13.B1@13.164,7.309 ; U13.E3@15.564,8.909 15.57,8.909 15.962,8.518 v1(15.975,8.518) ; v1(16.27,6.678) 16.27,6.738 16.364,6.833 U13.F1@16.364,7.309 ; U13.H11@17.964,15.309 17.964,16.132 18.007,16.174 v1(18.007,16.185) ; U13.L9@20.364,13.709 20.368,13.713 20.511,13.713 20.896,14.098 20.928,14.098 21.039,14.209 v1(21.099,14.209)
  Signal_T w0.305: R8.2@7.341,0.864 8.941,0.864 8.941,0.868 9.038,0.965 12.929,0.965 13.716,1.753 13.716,3.074 L2.2@13.995,3.353 ; U16.8@15.786,22.047 16.336,22.047 16.533,21.85 16.533,21.386 16.748,21.172 v1(16.748,21.133) ; v1@21.235,14.248 21.863,14.248 22.105,14.006 C4.2@22.155,14.006
  Signal_B w0.229: v1(15.975,8.518) 16.006,8.486 16.006,8.412 16.722,7.696 C3.2@16.772,7.696 ; v1(18.007,16.185) 17.992,16.2 17.992,16.888 C6.2@18.007,16.903
  Signal_B w0.254: v1@12.482,5.898 12.464,5.898 v1(12.443,5.877) 12.496,5.877 12.626,6.007 R3.1@13.615,6.007
  Signal_B w0.305: 15.443,3.302 15.443,2.651 v1(15.466,2.628) 16.26,2.628 ; C42.2@15.85,21.319 15.85,21.269 15.947,21.171 15.997,21.171 16.035,21.133 v1(16.748,21.133) ; v1(16.256,3.023) 16.26,3.019 16.26,2.628 ; v1(16.27,6.678) 16.298,6.65 16.298,6.292 16.301,6.288 16.301,5.955 C7.2@16.399,5.858 C7.2@16.399,5.908 ; C5.2@16.86,17.027 16.86,16.977 16.958,16.879 17.008,16.879 17.674,16.213 17.979,16.213 v1(18.007,16.185) ; R14.1@17.983,22.081 R11.1@19.177,22.081 19.607,21.65 19.607,21.338 v1(19.635,21.311) ; R17.2@20.365,2.423 R16.2@19.351,2.423 19.291,2.364 18.397,2.364 R15.2@18.337,2.423 18.278,2.364 17.201,2.364 16.937,2.628 16.26,2.628
  Signal_B w0.381: FB1.1@11.201,7.036 11.201,6.192 11.488,5.906 11.925,5.906 v1(11.938,5.893) ; v1@12.02,5.895 v1@12.457,5.895 ; v1@12.482,5.898 v1@12.747,6.164 ; v1@12.809,6.343 v1@12.809,6.78 ; v1@12.954,6.926 13.556,6.926 C8.2@13.615,6.985
  other v1: 15.451,1.985 16.256,2.032 15.088,3.277 15.494,3.835 16.256,3.861 15.049,4.434 13.25,4.962 14.35,4.962 13.81,5.229 12.802,6.274 13.744,19.794 14.303,19.794
+5V: C23.2 C25.1 C26.2 C28.2 C34.1 C36.1 J1.53 J1.54 J1.55 J1.56 J1.57 J1.58 J1.59 J1.60 U7.1 U7.4 U11.1 U11.4 U12.5 U13.E11 U20.1 U20.3 | length 28.8
  Signal_T w0.127: 15.564,15.966 15.564,16.25 16.18,16.866 16.18,18.313 v1(17.043,19.177)
  Signal_T w0.254: U13.E11@15.564,15.309 15.564,15.966
  Signal_T w0.508: C25.1@4.32,6.629 4.636,6.313 C34.1@6.372,6.313 C34.1@6.409,6.276 ; C23.2@7.671,6.223 7.671,6.264 7.667,6.268 6.417,6.268 C34.1@6.409,6.276 ; U7.1@9.001,3.136 7.989,3.136 6.731,4.394 6.731,4.99 6.447,4.99 6.409,5.028 C34.1@6.409,6.276
  PWR w0.203: v1(8.025,26.412) 8.937,26.412 9.22,26.695 14.402,26.695 15.037,26.06 15.037,21.082 15.545,20.574 16.18,20.574 17.043,19.71 v1(17.043,19.177)
  Signal_B w0.117: J1.58@21.725,18.9 J1.58@22.01,18.9
  Signal_B w0.508: C36.1@7.696,23.8 C36.1@7.696,23.85
  other v1: 5.056,2.889 7.607,3.123 5.423,3.53 4.813,3.605 5.074,4.14 5.772,4.14 6.616,4.139 4.432,4.189 3.956,4.648 4.724,4.75 3.34,5.028 4.45,18.162 5,18.162 6.65,18.162 25.865,18.181 26.557,18.181 22.97,18.357 24.061,18.357 26.202,18.825 23.535,18.927 20.811,19.07 4.45,19.262 5,19.262 22.97,19.4 24.061,19.425 25.865,19.443 26.557,19.443 4.45,20.362 4.45,21.462 5,21.462 4.45,22.562 5.55,22.562 4.725,23.112 5.825,23.112 6.375,23.112 5,23.662 7.75,24.762 8.3,24.762 6.375,25.312 6.925,25.312 7.475,25.312 8.3,25.862 4.725,26.412 5.275,26.412 5.825,26.412
B1_N: C88.2 U17.11 | length 4
  Signal_T w0.117: C88.2@7.344,10.271 7.344,10.249 7.152,10.057 7.129,10.057 7.016,9.943 7.016,9.652 7.31,9.358 8.037,9.358 8.265,9.585 8.265,10.525 8.454,10.714 8.73,10.714 8.82,10.805 U17.11@9.02,10.805
B1_P: C87.2 U17.12 | length 4.4
  Signal_T w0.117: C87.2@6.469,10.271 6.469,10.256 6.668,10.057 6.683,10.057 6.797,9.943 6.797,9.561 7.219,9.139 8.128,9.139 8.484,9.495 8.484,10.435 8.544,10.496 8.73,10.496 8.82,10.405 U17.12@9.02,10.405
C1_N: C90.2 U17.7 | length 1.2
  Signal_T w0.117: U17.7@9.62,12.205 9.62,12.405 9.53,12.496 9.53,12.88 C90.2@9.855,13.205
C1_P: C89.2 U17.8 | length 1.2
  Signal_T w0.117: C89.2@8.979,13.205 9.311,12.873 9.311,12.496 9.22,12.405 U17.8@9.22,12.205
FPGA_CLK: J1.27 U13.J6 | length 11.8
  Signal_T w0.102: 19.168,10.906 20.851,10.906 20.854,10.908 21.999,10.908 22.161,11.07 22.161,11.259 22.004,11.416 22.004,11.772 23,12.768 23.696,12.768 24.237,13.309 24.237,13.894 24.357,14.014 24.861,14.014 26.187,12.688 v1(26.187,12.598)
  Signal_T w0.229: U13.J6@18.764,11.309 19.168,10.906
  Signal_B w0.102: J1.27@24.99,12.9 25.886,12.9 v1(26.187,12.598)
FPGA_CTL0: J1.35 U13.K8 | length 11.5
  Signal_T w0.102: 19.962,13.307 20.83,13.307 21.031,13.106 21.669,13.106 21.869,13.307 22.277,13.307 22.403,13.181 23.563,13.181 23.851,13.469 23.851,14.16 24.091,14.4 25.052,14.4 25.824,13.628 26.531,13.628 26.695,13.792 26.695,14.63 26.568,14.757 26.213,14.757 v1(25.933,14.478)
  Signal_T w0.229: U13.K8@19.559,12.904 19.962,13.307
  Signal_B w0.102: J1.35@24.99,14.5 25.001,14.489 25.922,14.489 v1(25.933,14.478)
FPGA_CTL1: J1.31 U13.J7 | length 11.9
  Signal_T w0.102: 19.168,11.706 20.825,11.706 20.898,11.779 21.568,11.779 21.703,11.914 21.703,12.204 21.573,12.334 21.573,12.581 21.757,12.764 21.931,12.764 22.173,12.522 22.416,12.522 22.555,12.661 22.555,12.903 22.64,12.988 23.643,12.988 24.044,13.389 24.044,14.08 24.171,14.207 24.941,14.207 25.713,13.435 26.03,13.435 26.206,13.259 v1(26.264,13.259)
  Signal_T w0.229: U13.J7@18.764,12.109 19.168,11.706
  Signal_B w0.102: J1.31@24.99,13.7 25.822,13.7 v1(26.264,13.259)
FPGA_D0: J1.46 U13.F10 | length 11.9
  Signal_T w0.102: 16.755,14.9 16.755,16.326 17.022,16.594 17.356,16.594 17.524,16.762 17.524,16.944 17.272,17.196 17.272,17.313 17.417,17.458 17.594,17.458 17.882,17.17 18.059,17.17 18.237,17.348 18.237,17.526 18.136,17.628 18.136,17.781 18.385,18.031 18.537,18.031 18.847,17.721 19.156,17.721 19.215,17.78 19.215,17.994 19.275,18.053 19.598,18.053 19.658,17.994 19.658,17.78 19.717,17.721 20.111,17.721 20.358,17.967 v1(20.399,17.967)
  Signal_T w0.229: U13.F10@16.364,14.509 16.755,14.9
  Signal_B w0.102: v1(20.399,17.967) 20.389,17.958 20.081,17.958 19.942,17.818 19.942,17.435 20.001,17.376 20.213,17.376 20.401,17.187 20.401,16.861 20.726,16.535 21.975,16.535 J1.46@22.01,16.5
FPGA_D1: J1.48 U13.F9 | length 11.6
  Signal_T w0.102: 15.938,14.128 15.938,16.252 17.934,18.248 17.934,18.645 18.161,18.872 18.542,18.872 18.745,18.669 18.745,18.44 18.938,18.248 19.781,18.248 19.899,18.366 v1(19.993,18.366)
  Signal_T w0.229: 15.938,14.128 U13.F9@16.358,13.708
  Signal_B w0.102: v1(19.993,18.366) 20.819,18.366 21.234,17.951 21.234,17.145 21.479,16.9 J1.48@22.01,16.9
FPGA_D2: J1.22 U13.F7 | length 11.8
  Signal_T w0.229: U13.F7@16.358,12.103 v1@16.762,12.506
  Signal_INT w0.127: v1(16.758,12.502) 17.161,12.099 18.961,12.099 20.4,13.538 21.999,13.538 22.123,13.414 22.123,13.084 22.045,13.005 21.514,13.005 21.37,12.861 21.37,12.544 21.499,12.415 22.014,12.415 22.735,11.694 23.26,11.694 v1(23.275,11.709)
  Signal_B w0.127: J1.22@22.01,11.7 22.015,11.705 23.27,11.705 v1(23.275,11.709)
FPGA_D3: J1.47 U13.G10 | length 11.4
  Signal_T w0.102: 17.555,14.9 17.564,14.909 17.564,16.402 18.69,17.528 20.561,17.528 20.794,17.761 20.794,18.49 20.923,18.618 22.062,18.618 22.758,17.922 23.483,17.922 24.054,17.351 v1@24.054,17.272
  Signal_T w0.229: U13.G10@17.164,14.509 17.555,14.9
  Signal_B w0.102: v1@24.184,17.135 24.419,16.9 J1.47@24.99,16.9
  other v1: 24.057,17.275
FPGA_D4: J1.40 U13.G9 | length 12
  Signal_T w0.229: U13.G9@17.164,13.709 v1(17.564,14.109)
  Signal_B w0.102: v1(17.564,14.109) 17.507,14.109 17.33,13.932 17.026,13.932 16.521,14.438 16.521,15.375 16.628,15.482 17.367,15.482 17.703,15.818 19.152,15.818 19.355,16.021 19.355,16.358 19.482,16.485 19.482,17.096 19.541,17.156 20.081,17.156 20.168,17.069 20.168,16.883 20.108,16.824 19.943,16.824 19.883,16.764 19.883,16.563 19.943,16.503 20.45,16.503 20.638,16.315 20.638,16.159 20.378,15.899 20.378,15.515 20.576,15.316 21.994,15.316 J1.40@22.01,15.3
FPGA_D5: J1.32 U13.F8 | length 11.6
  Signal_T w0.229: U13.F8@16.364,12.909 v1@16.768,13.313
  Signal_B w0.102: v1(16.764,13.309) 16.405,12.95 15.968,12.95 15.862,13.056 15.862,15.401 15.922,15.461 16.268,15.461 16.328,15.401 16.328,14.358 16.965,13.72 19.272,13.72 19.381,13.612 21.372,13.612 21.46,13.7 J1.32@22.01,13.7
FPGA_D6: J1.45 U13.H10 | length 12.6
  Signal_T w0.102: U13.H10@17.964,14.509 18.386,14.931 18.386,16.361 18.62,16.595 19.026,16.595 19.087,16.656 19.087,16.897 19.028,16.957 18.756,16.957 18.669,17.043 18.669,17.234 18.75,17.316 20.622,17.316 20.987,17.681 20.987,18.32 21.082,18.415 21.992,18.415 22.678,17.729 23.292,17.729 23.446,17.575 23.446,17.216 23.659,17.003 v1(23.659,16.908)
  Signal_T w0.229: U13.H10@17.959,14.503 18.379,14.923
  Signal_B w0.102: v1(23.659,16.908) 24.012,16.556 24.934,16.556 J1.45@24.99,16.5
FPGA_D7: J1.36 U13.H9 | length 12.1
  Signal_T w0.229: U13.H9@17.964,13.71 v1@18.367,14.113
  Signal_B w0.102: v1(18.363,14.109) 17.996,14.476 17.291,14.476 17.117,14.302 16.929,14.302 16.714,14.518 16.714,15.229 16.773,15.289 17.447,15.289 17.783,15.625 19.232,15.625 19.604,15.997 19.604,16.149 19.736,16.281 20.108,16.281 20.168,16.222 20.168,16.019 20.086,15.937 20.086,15.233 19.738,14.885 19.738,14.501 19.875,14.365 20.137,14.365 20.196,14.424 20.196,14.716 20.4,14.92 20.908,14.92 21.327,14.5 J1.36@22.01,14.5
FPGA_D8: J1.43 U13.J10 | length 12.6
  Signal_T w0.102: U13.J10@18.764,14.509 19.139,14.884 ; 19.182,14.932 19.182,16.35 19.388,16.557 19.388,17.003 19.508,17.123 19.747,17.123 19.817,17.053 19.817,16.85 19.892,16.774 20.137,16.774 20.215,16.852 20.215,17.054 20.274,17.114 20.807,17.114 20.88,17.041 21.287,17.041 21.346,17.1 21.346,17.3 21.305,17.341 21.178,17.467 21.178,17.599 21.18,17.601 21.18,18.092 21.311,18.222 21.642,18.222 21.701,18.162 21.701,17.829 21.761,17.769 22.02,17.769 22.081,17.831 22.303,17.831 22.598,17.536 23.138,17.536 23.253,17.421 23.253,17.027 23.175,16.95 23.175,16.657 v1(23.109,16.59)
  Signal_T w0.229: U13.J10@18.762,14.512 19.182,14.932
  Signal_B w0.102: v1(23.109,16.59) 23.178,16.59 23.406,16.362 24.311,16.362 24.518,16.155 24.935,16.155 J1.43@24.99,16.1
FPGA_D9: J1.34 U13.J9 | length 11.9
  Signal_T w0.229: U13.J9@18.764,13.709 v1@19.168,14.113
  Signal_B w0.102: v1(19.164,14.109) 18.604,14.669 16.986,14.669 16.907,14.748 16.907,14.995 17.007,15.096 17.527,15.096 17.863,15.432 19.311,15.432 19.538,15.658 19.622,15.658 19.884,15.396 19.884,15.312 19.558,14.986 19.558,14.979 19.494,14.915 19.494,14.473 19.736,14.23 19.736,14.107 19.795,14.047 20.2,14.047 20.259,14.107 20.259,14.153 20.406,14.3 20.406,14.653 20.48,14.726 20.654,14.726 20.731,14.649 20.731,14.057 20.954,13.834 21.288,13.834 21.502,14.048 21.958,14.048 J1.34@22.01,14.1
FPGA_D10: J1.44 U13.K11 | length 12.3
  Signal_T w0.102: U13.K11@19.564,15.309 19.564,15.824 19.564,16.46 19.685,16.581 20.376,16.581 20.453,16.504 20.453,16.364 20.513,16.304 20.772,16.304 20.832,16.364 20.832,16.788 20.891,16.848 21.104,16.848 21.164,16.788 21.164,16.222 21.223,16.162 21.48,16.162 21.539,16.222 21.539,17.474 21.639,17.574 21.885,17.574 21.945,17.515 21.945,15.603 22.004,15.544 22.267,15.544 22.327,15.603 22.327,16.688 22.428,16.789 22.628,16.789 22.741,16.676 22.741,16.273 22.922,16.092 v1(22.922,16.03)
  Signal_T w0.254: U13.K11@19.564,15.309 19.564,15.824
  Signal_B w0.102: J1.44@22.01,16.1 22.66,16.1 22.663,16.097 22.856,16.097 v1(22.922,16.03)
FPGA_D11: J1.41 U13.L10 | length 12
  Signal_T w0.102: U13.L10@20.364,14.509 21.005,15.15 23.075,15.15 23.52,15.596 24.308,15.596 24.638,15.926 24.638,16.315 24.839,16.516 25.091,16.516 25.25,16.676 25.391,16.676 25.605,16.462 25.605,16.002 25.545,15.942 25.149,15.942 25.027,15.821 25.027,15.613 25.222,15.418 25.222,15.075 25.163,15.016 24.936,15.016 24.722,15.23 24.519,15.23 24.198,14.91 24.013,14.91 24.013,14.913 v1@23.953,14.972
  Signal_T w0.229: U13.L10@20.364,14.509 20.819,14.964
  Signal_B w0.102: v1@23.953,14.972 23.953,15.178 24.474,15.699 24.989,15.699 J1.41@24.99,15.7
  other v1: 23.75,14.972
FPGA_D12: J1.42 U13.K10 | length 12.9
  Signal_T w0.102: U13.K10@19.564,14.509 19.986,14.931 ; 19.989,14.934 19.986,14.931 ; v1(24.157,15.995) 24.157,16.089 24.266,16.198 24.266,16.216 24.759,16.709 25.008,16.709 25.127,16.829 25.127,17.277 25.026,17.377 24.718,17.377 23.882,16.541 23.68,16.541 23.338,16.199 23.338,15.853 22.828,15.343 21.716,15.343 20.947,16.111 20.252,16.111 19.984,15.844 19.984,14.931 19.986,14.931
  Signal_T w0.229: U13.K10@19.564,14.511 19.984,14.931
  Signal_B w0.102: J1.42@22.01,15.7 22.047,15.663 23.41,15.663 23.742,15.995 v1(24.157,15.995)
FPGA_D13: J1.39 U13.K9 | length 12.2
  Signal_T w0.102: 19.968,14.113 20.387,14.113 21.231,14.957 23.166,14.957 23.518,14.605 25.146,14.605 25.425,14.884 25.425,15.481 25.798,15.854 25.798,16.443 25.93,16.575 26.529,16.575 26.772,16.332 26.772,15.545 26.467,15.24 v1(26.086,15.24)
  Signal_T w0.229: U13.K9@19.564,13.709 19.968,14.113
  Signal_B w0.102: J1.39@25.02,15.27 26.056,15.27 v1(26.086,15.24)
FPGA_D14: J1.30 U13.J8 | length 12.1
  Signal_T w0.229: U13.J8@18.764,12.909 v1@19.168,13.313
  Signal_B w0.102: v1(19.164,13.309) 19.106,13.309 18.887,13.527 18.14,13.527 17.985,13.373 17.985,13.134 17.755,12.903 17.374,12.903 17.158,12.688 17.158,11.499 17.341,11.316 19.102,11.316 19.275,11.49 19.275,11.735 19.148,11.862 18.629,11.862 18.455,12.036 18.455,12.382 18.671,12.598 19.186,12.598 19.905,13.317 21.993,13.317 J1.30@22.01,13.3
FPGA_D15: J1.24 U13.G8 | length 11.6
  Signal_T w0.229: U13.G8@17.164,12.909 17.167,12.909 17.562,12.515 v1(17.564,12.515)
  Signal_INT w0.127: v1(17.564,12.515) 17.569,12.51 19.012,12.51 20.295,13.792 24.256,13.792 24.414,13.635 24.414,13.117 24.256,12.959 23.355,12.959 22.962,12.566 22.962,12.164 v1(22.907,12.11)
  Signal_B w0.127: J1.24@22.01,12.1 22.018,12.108 22.905,12.108 v1(22.907,12.11)
FPGA_D16: J1.13 U13.K2 | length 11.8
  Signal_T w0.229: U13.K2@19.568,8.107 19.568,8.104 19.985,7.688 v1(19.985,7.676)
  Signal_INT w0.127: v1(19.985,7.676) 19.995,7.676 20.33,7.341 21.422,7.341 21.704,7.623 24.509,7.623 25.242,8.357 25.629,8.357 25.914,8.071 25.914,7.692 26.028,7.579 26.395,7.579 26.469,7.653 26.469,9.442 v1(26.441,9.47)
  Signal_B w0.127: J1.13@24.99,10.1 25.541,10.1 25.64,10.001 25.91,10.001 v1(26.441,9.47)
FPGA_D17: J1.18 U13.J4 | length 12
  Signal_T w0.229: U13.J4@18.762,9.709 U13.J4@18.764,9.709 19.18,10.124 v1(19.182,10.124)
  Signal_B w0.102: v1(19.182,10.124) 17.331,10.124 16.984,10.471 16.161,10.471 16.027,10.605 16.027,10.803 16.155,10.93 17.475,10.93 17.905,10.5 18.342,10.5 18.728,10.887 19.558,10.887 19.764,10.68 19.764,10.151 19.995,9.919 20.213,9.919 20.447,10.154 21.226,10.154 21.369,10.297 21.369,10.84 21.429,10.9 J1.18@22.01,10.9
FPGA_D18: J1.23 U13.K1 | length 12.3
  Signal_T w0.102: U13.K1@19.564,7.309 19.979,6.895 20.383,6.491 21.68,6.491 22.084,6.896 22.084,7.244 21.581,7.748 21.581,8.128 22.123,8.671 22.389,8.671 22.707,8.353 23.159,8.353 23.321,8.515 23.321,9.294 23.642,9.615 23.642,10.553 23.786,10.696 23.786,11.957 24.069,12.24 v1(24.087,12.24)
  Signal_T w0.229: U13.K1@19.558,7.314 19.978,6.894
  Signal_B w0.102: v1(24.087,12.24) 24.282,12.044 24.934,12.044 J1.23@24.99,12.1
FPGA_D19: J1.17 U13.J2 | length 12.2
  Signal_T w0.102: U13.J2@18.764,8.109 19.152,7.722 19.152,7.706 19.15,7.704 19.154,7.701 ; 19.152,7.678 19.297,7.533 19.297,6.951 19.596,6.652 v1(19.603,6.652)
  Signal_T w0.229: U13.J2@18.774,8.104 18.774,8.102 19.164,7.712 19.154,7.701 19.152,7.699 19.152,7.678
  Signal_B w0.102: v1(19.603,6.652) 19.603,6.645 20.584,5.664 22.2,5.664 22.454,5.918 22.454,6.262 22.942,6.751 22.942,7.095 23.546,7.698 23.546,10.212 24.234,10.9 J1.17@24.99,10.9
FPGA_D20: J1.8 U13.J3 | length 11.6
  Signal_T w0.229: U13.J3@18.774,8.911 18.774,8.905 19.164,8.516 v1(19.173,8.516)
  Signal_INT w0.127: v1(19.173,8.516) 19.215,8.474 21.5,8.474 21.844,8.131 24.178,8.131 25.051,9.005 25.051,9.713 24.741,10.024 24.016,10.024 23.772,9.78 23.772,9.331 23.479,9.037 22.994,9.037 v1(22.932,8.976)
  Signal_B w0.127: J1.8@22.01,8.9 22.026,8.916 22.872,8.916 v1(22.932,8.976)
FPGA_D21: J1.21 U13.J1 | length 11.9
  Signal_T w0.102: 18.759,6.891 19.365,6.285 21.884,6.285 22.306,6.707 22.306,7.295 22.028,7.573 22.028,7.822 22.366,8.16 22.729,8.16 22.882,8.007 23.186,8.007 23.514,8.336 23.514,9.212 23.835,9.534 23.835,10.473 24.137,10.775 24.137,11.66 v1(24.153,11.676)
  Signal_T w0.229: 18.759,6.891 U13.J1@18.759,7.311
  Signal_B w0.102: v1(24.153,11.676) 24.171,11.658 24.948,11.658 J1.21@24.99,11.7
FPGA_D22: J1.11 U13.H2 | length 12.5
  Signal_T w0.102: U13.H2@17.964,8.109 18.387,7.686 18.387,6.9 19.195,6.092 21.964,6.092 22.499,6.627 22.499,7.375 22.262,7.612 22.262,7.783 22.446,7.967 22.618,7.967 22.893,7.692 23.368,7.692 23.901,8.225 23.901,8.694 23.707,8.888 23.707,9.133 24.176,9.601 v1(24.203,9.601)
  Signal_T w0.229: U13.H2@17.967,8.107 18.387,7.687
  Signal_B w0.102: v1(24.203,9.601) 24.252,9.65 24.94,9.65 J1.11@24.99,9.7
FPGA_D23: J1.15 U13.H3 | length 11.9
  Signal_T w0.229: U13.H3@17.966,8.907 v1@18.386,8.487
  Signal_INT w0.127: v1(18.365,8.488) 18.752,8.101 19.804,8.101 19.809,8.105 20.267,8.105 20.755,7.617 21.336,7.617 21.596,7.877 24.283,7.877 25.429,9.023 25.429,9.264 v1(26.442,10.277)
  Signal_B w0.127: J1.15@24.99,10.5 26.132,10.5 26.293,10.339 26.293,10.277 v1(26.442,10.277)
FPGA_D24: J1.6 U13.F4 | length 12
  Signal_T w0.229: U13.F4@16.368,9.706 16.368,9.7 16.764,9.304 v1(16.764,9.271)
  Signal_INT w0.127: v1(16.764,9.271) 16.791,9.271 17.167,8.895 17.167,8.176 17.167,7.921 17.043,7.798 17.043,7.442 17.272,7.214 18.129,7.214 19.348,5.994 21.006,5.994 21.766,6.755 21.766,6.999 v1(21.717,7.048)
  Signal_B w0.127: v1(21.717,7.048) 22.605,7.048 23.095,7.538 23.095,8.108 22.703,8.5 J1.6@22.01,8.5
FPGA_D25: J1.9 U13.G2 | length 12.3
  Signal_T w0.102: U13.G2@17.164,8.109 17.604,7.669 17.604,7.11 17.589,7.094 17.589,6.535 18.225,5.899 22.044,5.899 22.817,6.672 22.817,7.12 23.144,7.447 23.592,7.447 24.121,7.976 v1(24.121,9.026)
  Signal_T w0.229: U13.G2@17.163,8.12 17.583,7.7
  Signal_B w0.102: v1(24.121,9.026) 24.14,9.026 24.413,9.3 J1.9@24.99,9.3
FPGA_D26: J1.2 U13.G3 | length 11.9
  Signal_T w0.229: U13.G3@17.167,8.904 17.17,8.904 v1(17.582,8.492)
  Signal_B w0.102: v1(17.582,8.492) 17.582,8.478 18.324,7.736 18.324,5.176 18.482,5.017 19.648,5.017 19.812,5.182 19.812,5.817 19.71,5.918 19.405,5.918 19.236,6.087 19.236,7.457 19.822,8.043 20.151,8.043 20.777,7.417 21.442,7.417 21.725,7.7 J1.2@22.01,7.7